# Altium PCB Dolphin.PcbDoc (part 1 of 3)
Units mil, origin at the board's own origin, x right, y up, seen from the top; angles counter-clockwise.
Board outline 4250 x 2750 mil, 4 copper layers (Top Layer, GND, POWER, Bottom Layer); 213 components, 151 nets, 660 pads, 338 vias.
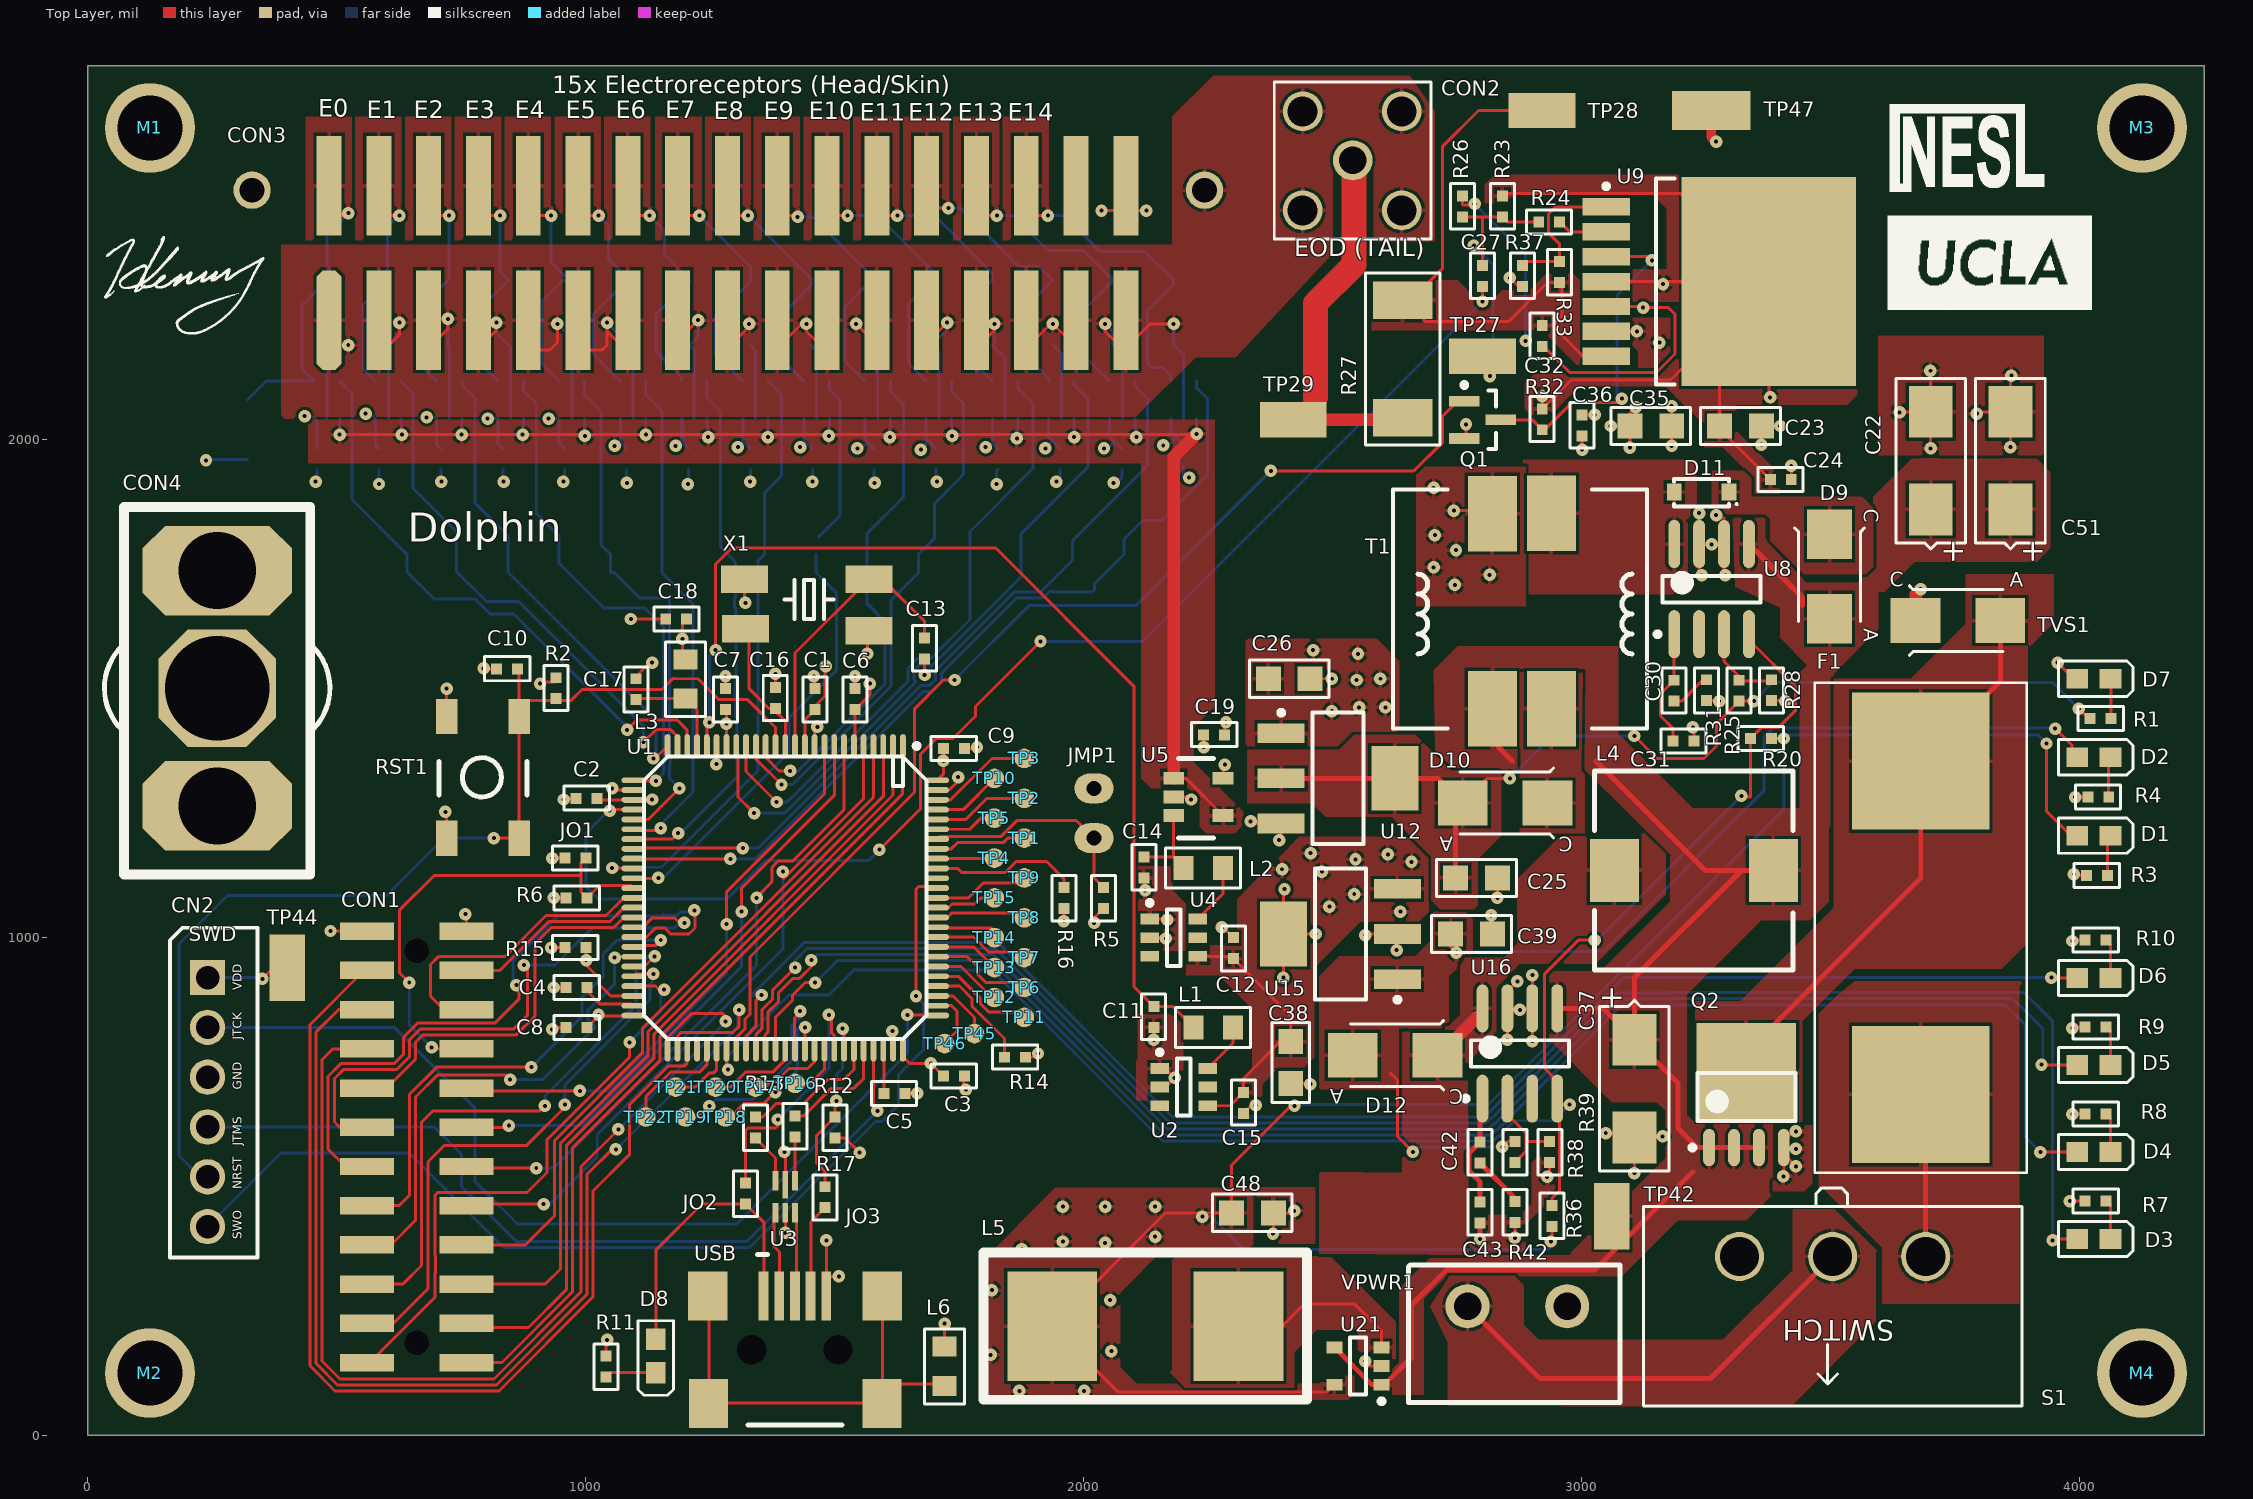
[diagram p0: Top Layer view]
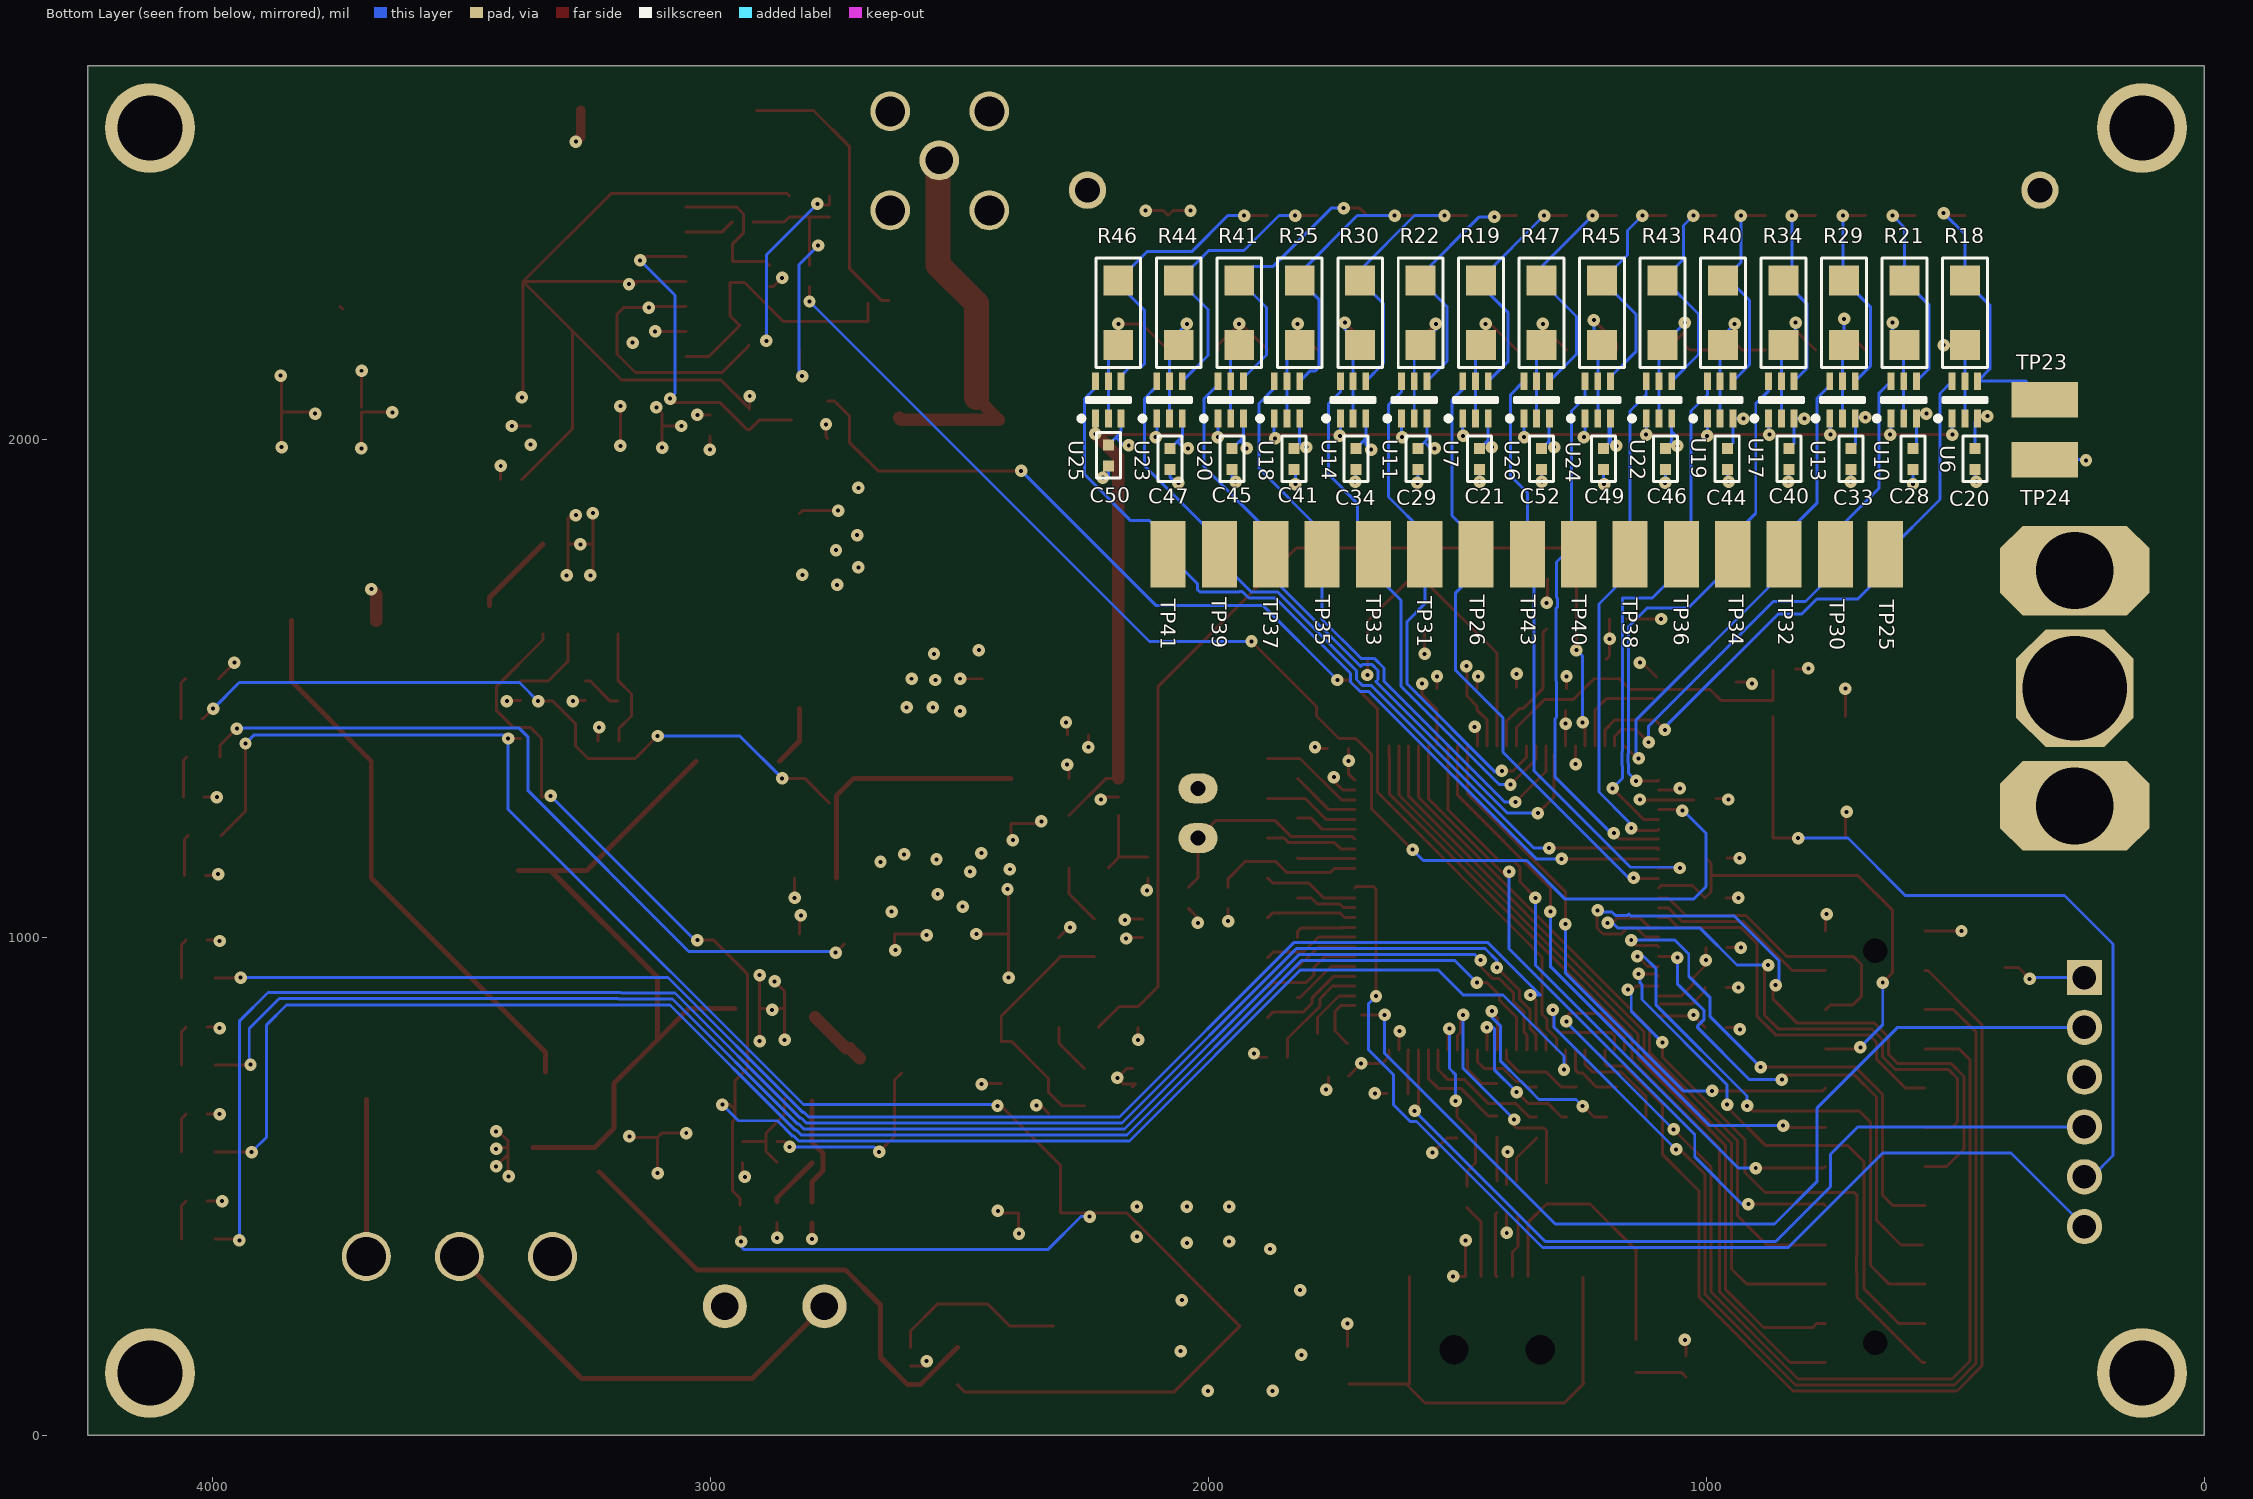
[diagram p1: Bottom Layer view, seen from below]
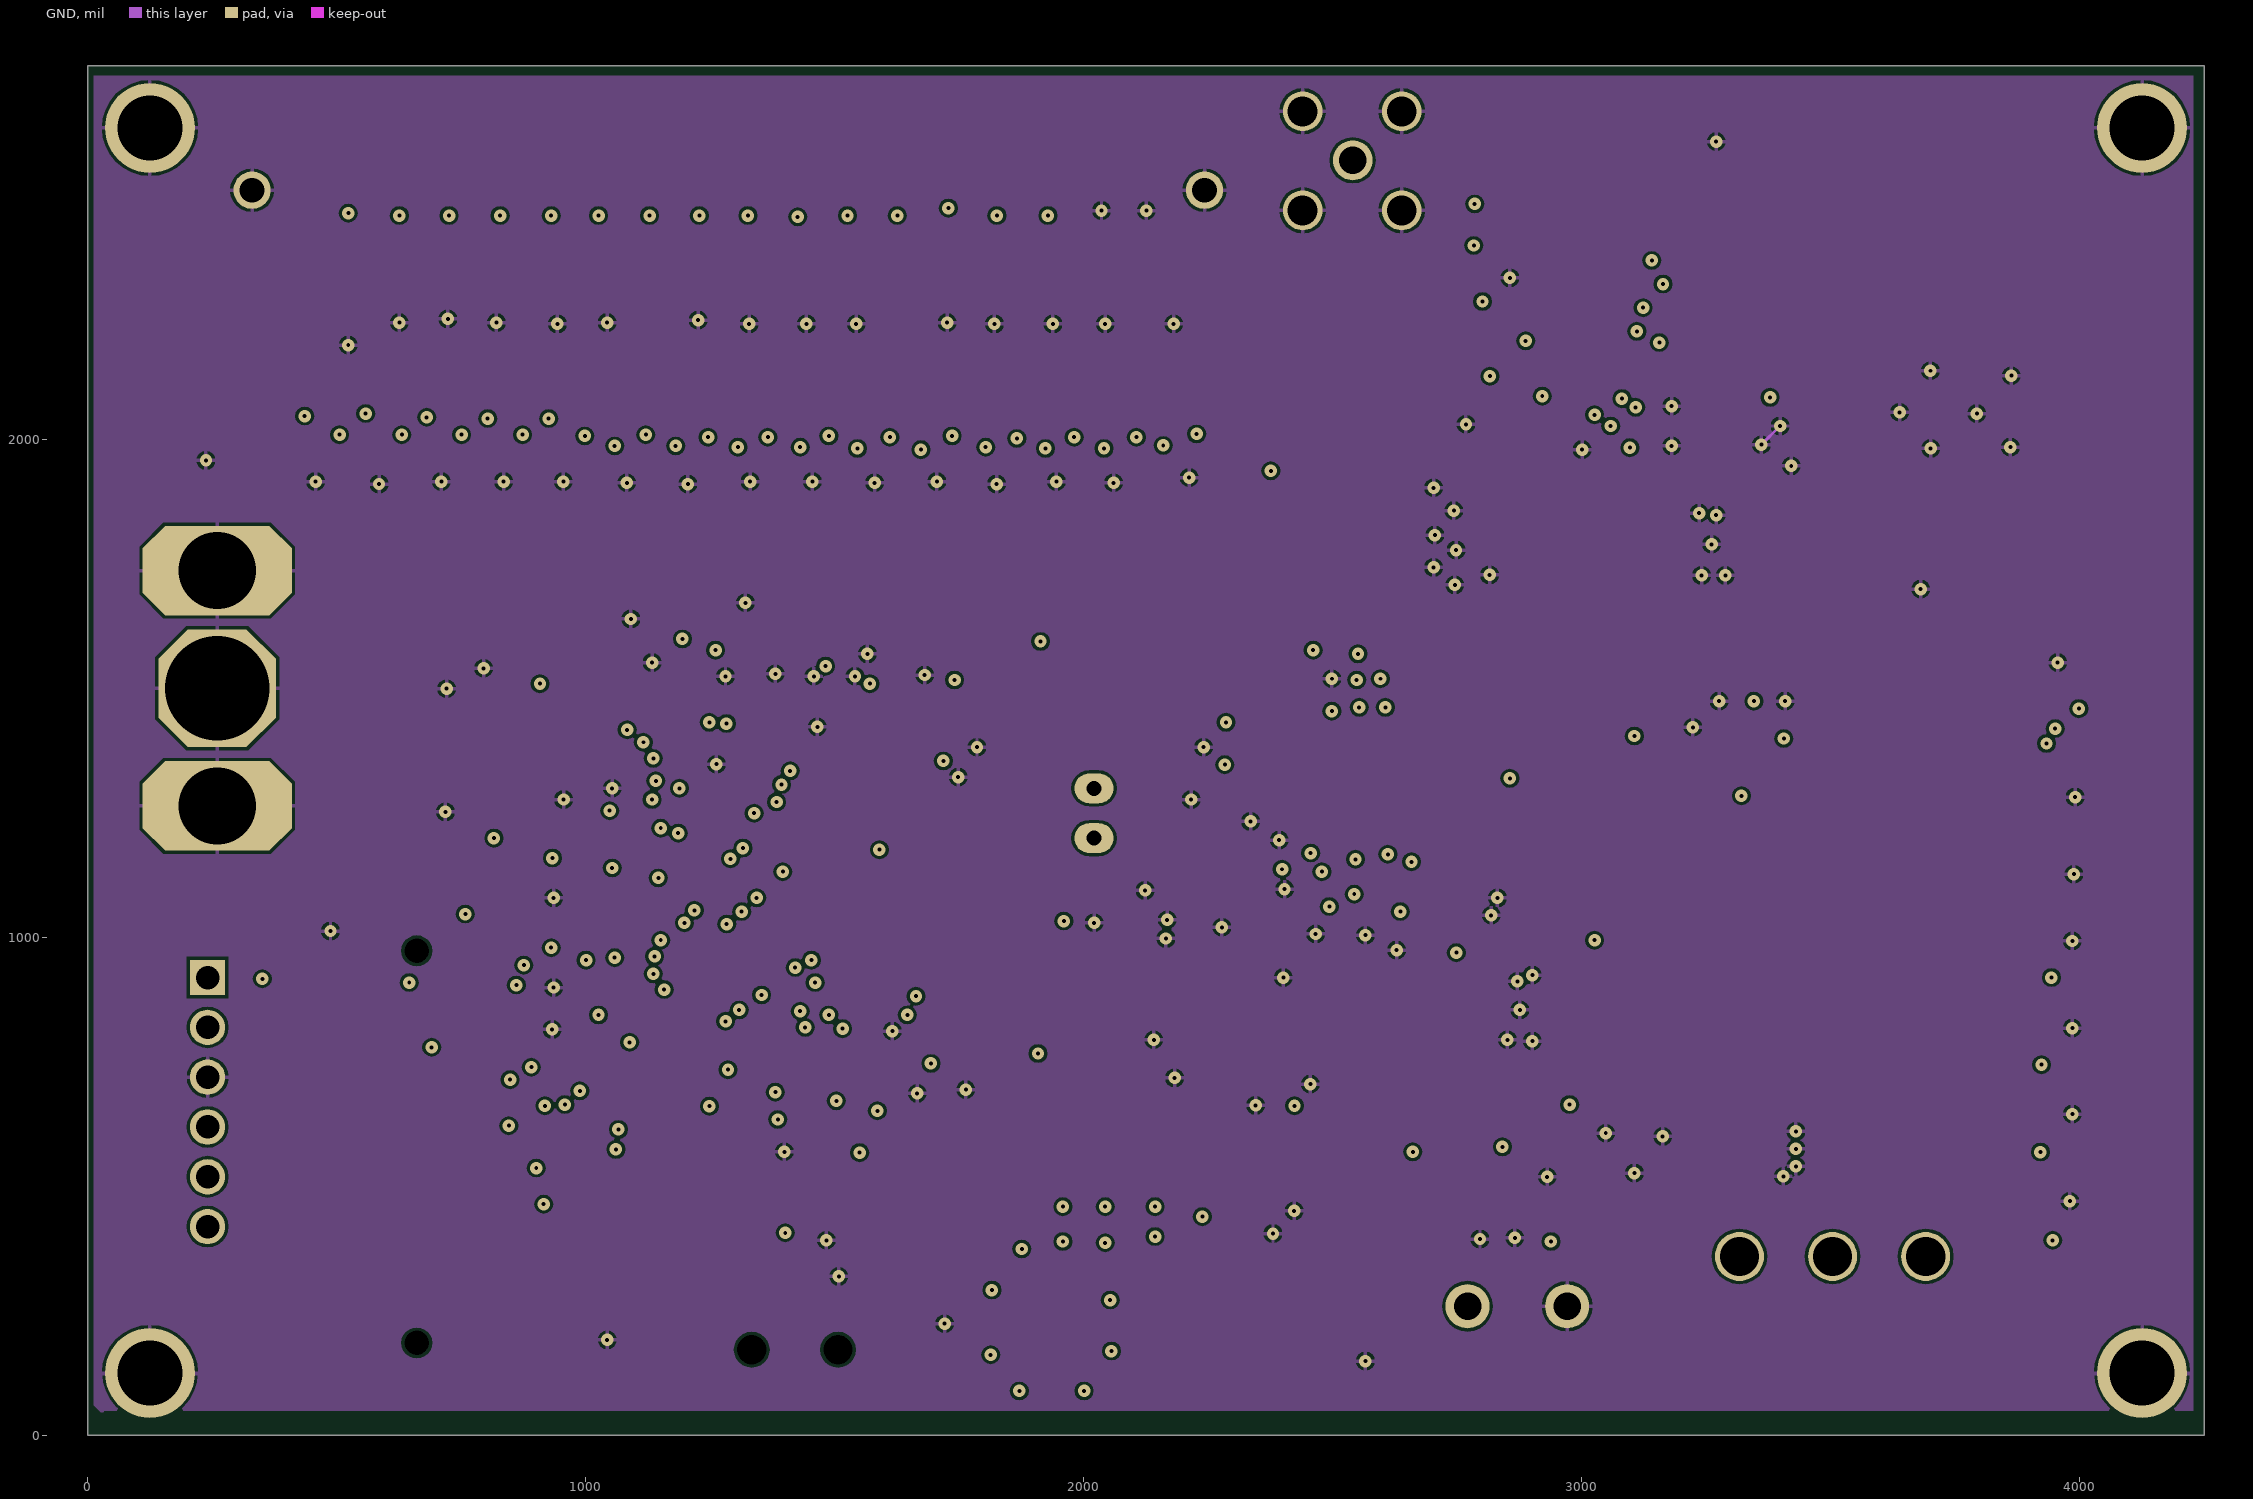
[diagram p2: GND]
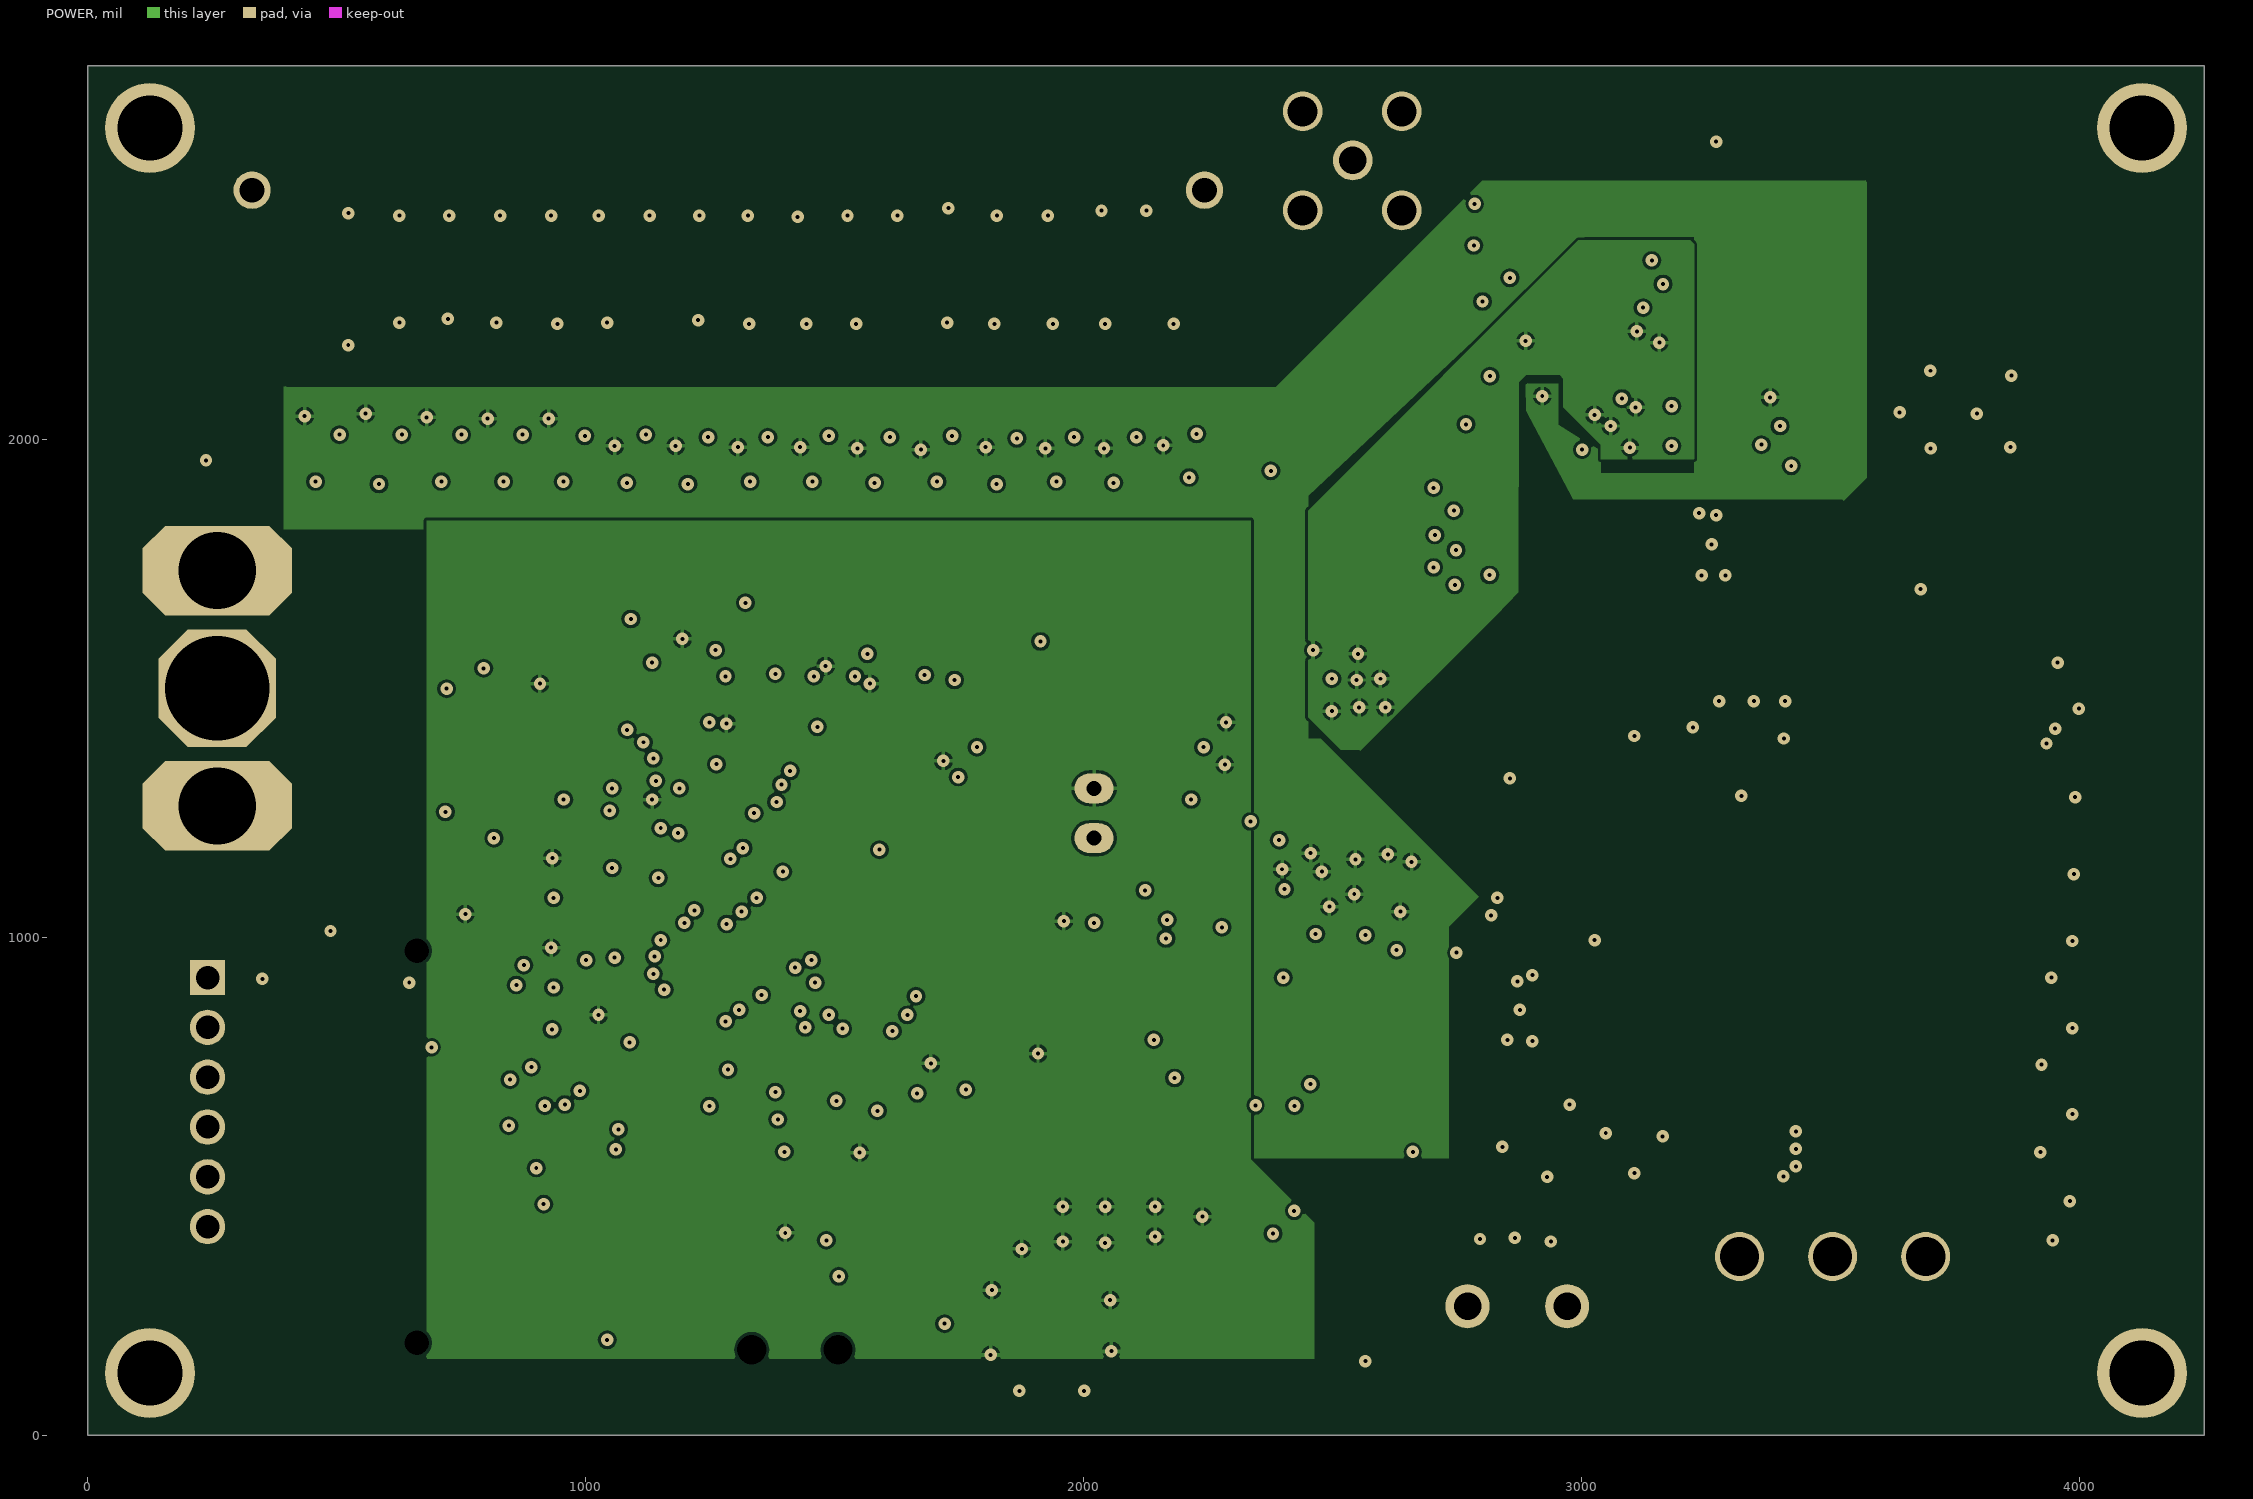
[diagram p3: POWER]

## Layer stack, top to bottom
Top Layer: signal copper 1.4
Dielectric: core 12.6, FR-4, Dk 4.8
GND: signal copper 1.4
Dielectric: prepreg 12.6, FR-4, Dk 4.8
POWER: signal copper 1.4
Dielectric: core 12.6, FR-4, Dk 4.8
Bottom Layer: signal copper 1.4

## Board outline
0,0 4250,0 4250,2750 0,2750

## Design rules (kind name [scope] priority, off if disabled: settings)
Clearance "Clearance~Sunstone Circuits" [All] p1: gap=6 // Sunstone Circuits Minimum Clearance Rule (MLB~4&6 Layer Designs)
HoleSize "HoleSize~Sunstone Circuits" [All] p1: absolutevalues=TRUE maxlimit=251 minlimit=8 maxpercent=80.000 minpercent=20.000 // Sunstone Circuits Hole Size Rule (MLB~4&6 Layer Designs)
HoleSize Testpoint [All] p2: absolutevalues=TRUE maxlimit=100 minlimit=1 maxpercent=80.000 minpercent=20.000
HoleSize TestPointUsage [All] p3: absolutevalues=TRUE maxlimit=100 minlimit=1 maxpercent=80.000 minpercent=20.000
MinimumAnnularRing "MinimumAnnularRing~Sunstone Circuits" [All] p1: minimumring=7 // Sunstone Circuits Minimum Annular Ring (MLB~4&6 Layer Designs)
PlaneClearance "PlaneClearance~Sunstone Circuits" [All] p1: clearance=12 // Sunstone Circuits Power Plane Clearance Rule (MLB~4&6 Layer Designs)
PlaneConnect "PlaneConnect~Sunstone Circuits" [All] p1: planeconnectstyle=Relief reliefexpansion=10 reliefentries=4 reliefconductorwidth=8 reliefairgap=10 // Sunstone Circuits Power Plane Connect Rule (MLB~4&6 Layer Designs)
PolygonConnect "PolygonConnect~Sunstone Circuits" [All] p1: connectstyle=Relief reliefconductorwidth=8 reliefentries=4 polygonreliefangle="90 Angle" // Sunstone Circuits Polygon Connect Style (MLB~4&6 Layer Designs)
RoutingVias "RoutingVias~Sunstone Circuits" [All] p1: holewidth=16 width=30 viastyle="Through Hole" minholewidth=8 minwidth=24 maxholewidth=20 maxwidth=40 // Sunstone Circuits Routing Vias Rule (MLB~4&6 Layer Designs)
ShortCircuit "ShortCircuit~Sunstone Circuits" [All] p1: allowed=FALSE // Sunstone Circuits Short Circuit Rule~Do Not Allow (MLB~4&6 Layer Designs)
SilkscreenOverComponentPads [All] p1: minsilkscreentomaskgap=10
SolderMaskExpansion "SolderMaskExpansion~Sunstone Circuits" [All] p1: expansion=3 // Sunstone Circuits Solder Mask Expansion Rule (MLB~4&6 Layer Designs)
ViasUnderSMD "ViasUnderSMD~Sunstone Circuits" [All] p1: allowed=FALSE // Sunstone Circuits Vias Under SMD~Do Not Allow (MLB~4&6 Layer Designs)
Width "Width~Sunstone Circuits" [All] p1: maxlimit=100 minlimit=6 preferedwidth=10 // Sunstone Circuits Minimum Width Rule (MLB~4&6 Layer Designs)
23 further rules are at their usual default settings.

## Components (designator, comment, footprint, x,y, rotation, side; value= is the part's Value field where it differs from the comment)
C1 "CAP" SM/C_0402 1460.65,1499.04 r270 top
C2 "CAP" SM/C_0402 980.65,1279.04 r0 top
C3 "CAP" SM/C_0402 1760.65,721.54 r180 top
C4 "CAP" SM/C_0402 960.65,899.04 r0 top
C5 "CAP" SM/C_0402 1640.65,686.54 r180 top
C6 "CAP" SM/C_0402 1540.65,1499.04 r270 top
C7 "CAP" SM/C_0402 1280.65,1499.04 r270 top
C8 "CAP" SM/C_0402 960.65,819.04 r0 top
C9 "CAP" SM/C_0402 1760.65,1379.04 r180 top
C10 "CAP" SM/C_0402 820.65,1539.04 r0 top
C11 "CAP" SM/C_0402 2140.65,819.04 r90 top
C12 "CAP" SM/C_0402 2300.65,999.04 r270 top
C13 "CAP" SM/C_0402 1680.65,1559.04 r90 top
C14 "CAP" SM/C_0402 2120.65,1119.04 r90 top
C15 "CAP" SM/C_0402 2320.65,646.54 r90 top
C16 "CAP" SM/C_0402 1380.65,1459.04 r90 top
C17 "CAP" SM/C_0402 1100.65,1519.04 r270 top
C18 "CAP" SM/C_0402 1160.65,1639.04 r0 top
C19 "CAP" SM/C_0402 2240.65,1406.54 r0 top
C20 "CAP" SM/C_0402 460.65,1939.04 r90 bottom
C21 "CAP" SM/C_0402 1454.93,1939.04 r90 bottom
C22 "CAP_POL" SM/CT_6032_12 3700.65,1859.04 r90 top
C23 "CAP" SM/C_0805 3360.65,2026.54 r180 top
C24 "CAP" SM/C_0402 3420.65,1919.04 r180 top
C25 "CAP" SM/C_0805 2830.65,1119.04 r180 top
C26 "CAP" SM/C_0805 2370.65,1519.04 r0 top
C27 "CAP" SM/C_0402 2800.65,2306.54 r90 top
C28 "CAP" SM/C_0402 584.93,1939.04 r90 bottom
C29 "CAP" SM/C_0402 1579.22,1939.04 r90 bottom
C30 "CAP" SM/C_0402 3185.65,1474.04 r90 top
C31 "CAP" SM/C_0402 3225.65,1394.04 r180 top
C32 "CAP" SM/C_0402 2920.65,2186.54 r90 top
C33 "CAP" SM/C_0402 709.22,1939.04 r90 bottom
C34 "CAP" SM/C_0402 1703.5,1939.04 r90 bottom
C35 "CAP" SM/C_0805 3180.65,2026.54 r180 top
C36 "CAP" SM/C_0402 3000.65,2006.54 r90 top
C37 "CAP_POL" SM/CT_6032_12 3105.65,794.04 r270 top
C38 "CAP" SM/C_0805 2415.65,706.54 r90 top
C39 "CAP" SM/C_0805 2820.65,1006.54 r180 top
C40 "CAP" SM/C_0402 833.5,1939.04 r90 bottom
C41 "CAP" SM/C_0402 1827.79,1939.04 r90 bottom
C42 "CAP" SM/C_0402 2795.65,546.54 r90 top
C43 "CAP" SM/C_0402 2795.65,426.54 r90 top
C44 "CAP" SM/C_0402 957.79,1939.04 r90 bottom
C45 "CAP" SM/C_0402 1952.07,1939.04 r90 bottom
C46 "CAP" SM/C_0402 1082.07,1939.04 r90 bottom
C47 "CAP" SM/C_0402 2076.36,1939.04 r90 bottom
C48 "CAP" SM/C_0805 2380.65,446.54 r180 top
C49 "CAP" SM/C_0402 1206.36,1939.04 r90 bottom
C50 "CAP" SM/C_0402 2200.64,1946.54 r90 bottom
C51 "CAP_POL" SM/CT_6032_12 3860.65,1859.04 r90 top
C52 "CAP" SM/C_0402 1330.64,1939.04 r90 bottom
CN2 "SWD" M06X1-Header-thru 240.65,919.04 r0 top
CON1 "24pinHeader" CONN-RECEPT-24PIN 660.65,579.04 r90 top
CON2 "SMA" SMA-SMA-VERT 2540,2560 r0 top
CON3 "34 Pin Header" "34Pin-Rectangular Header-SurfaceMount-100milSpacing" 484.65,2239.03 r0 top
CON4 "SCREW TERM (10-32)" LOW-PROFILE-SCREWTERMINAL 260,1500 r270 top
D1 "ORGE" LED-0603 4028.15,1204.04 r0 top
D2 "ORGE" LED-0603 4028.15,1361.54 r0 top
D3 "ORGE" LED-0603 4028.15,394.04 r0 top
D4 "BLUE" LED-0603 4028.15,568.72 r0 top
D5 "RED" LED-0603 4028.15,743.4 r0 top
D6 "GREEN" LED-0603 4028.15,918.08 r0 top
D7 "GREEN" LED-0603 4028.15,1519.04 r0 top
D8 "468 NM" LED-0603 1140.65,159.04 r270 top
D9 "TVS" D0-214AC 3500.65,1719.04 r270 top
D10 "MBRS130LT3G" D0-214AC 2840.65,1266.54 r180 top
D11 "1N4148WX" "SOD323 - MCC - 1N4148WX" 3145.65,1914.04 r180 top
D12 "MBRS130LT3G" D0-214AC 2620,760 r180 top
F1 "0031.8221" "SCHURTER/SMD/2 PADS/0031.8221" 3680.65,1019.04 r90 top
JMP1 "JMPR-2PIN-THRU" M02 2020.65,1199.04 r90 top
JO1 "Res" SM/R_0402 1000.65,1159.04 r180 top
JO2 "Res" SM/R_0402 1320.65,506.54 r270 top
JO3 "Res" SM/R_0402 1480.65,499.04 r270 top
L1 "Inductor" SM/L_0805 2220.65,819.04 r0 top
L2 "Inductor" SM/L_0805 2200.65,1139.04 r0 top
L3 "Inductor" SM/L_0805 1200.65,1479.04 r90 top
L4 "22uH" G_JMETRIC/TDK/SLE10145 3065.65,1134.04 r0 top
L5 "IHSM3825ER100L" "INDUCTOR POWER 10UH 1.74A SMD" 2310.65,219.04 r180 top
L6 "Inductor" SM/L_0805 1720.65,99.04 r90 top
M1 "M3" MOUNTING_HOLE-125mil#1 220.65,2359.04 r0 top
M2 "M3" MOUNTING_HOLE-125mil#2 300.65,199.04 r0 top
M3 "M3" MOUNTING_HOLE-125mil#3 4000.65,2399.04 r0 top
M4 "M3" MOUNTING_HOLE-125mil#4 4000.65,199.04 r0 top
Q1 "BSS84-PFET" SOT23-BSS84-P-MOSFET 2800.65,2039.04 r0 top
Q2 "SI4423DY-T1-E3" SOIC-8-Lead-Vishay-PFET 3330.65,679.04 r90 top
R1 "Res" SM/R_0402 4020.65,1439.04 r0 top
R2 "Res" SM/R_0402 940.65,1479.04 r90 top
R3 "Res" SM/R_0402 4055.65,1124.04 r180 top
R4 "Res" SM/R_0402 4058.15,1281.54 r180 top
R5 "Res" SM/R_0402 2040,1100 r270 top
R6 "Res" SM/R_0402 960.65,1079.04 r0 top
R7 "Res" SM/R_0402 4010.58,469.99 r0 top
R8 "Res" SM/R_0402 4010.58,644.67 r0 top
R9 "Res" SM/R_0402 4010.58,819.36 r0 top
R10 "Res" SM/R_0402 4010.58,994.04 r0 top
R11 "Res" SM/R_0402 1040.65,159.04 r270 top
R12 "Res" SM/R_0402 1500.65,639.04 r270 top
R13 "Res" SM/R_0402 1340.65,639.04 r270 top
R14 "Res" SM/R_0402 1840.65,759.04 r0 top
R15 "Res" SM/R_0402 1000.65,979.04 r180 top
R16 "Res" SM/R_0402 1960,1100 r270 top
R17 "Res" SM/R_0402 1420.65,599.04 r90 top
R18 "Res" SM/R_1206 480.65,2319.04 r270 bottom
R19 "Res" SM/R_1206 1452.07,2319.04 r270 bottom
R20 "Res" SM/R_0402 3380.65,1399.04 r180 top
R21 "Res" SM/R_1206 602.07,2319.04 r270 bottom
R22 "Res" SM/R_1206 1573.5,2319.04 r270 bottom
R23 "Res" SM/R_0402 2840.65,2446.54 r90 top
R24 "Res" SM/R_0402 2955.65,2436.54 r180 top
R25 "Res" SM/R_0402 3315.78,1474.04 r90 top
R26 "Res" SM/R_0402 2760.65,2446.54 r90 top
R27 "Res" SM/R_2512 2640.65,2279.04 r270 top
R28 "Res" SM/R_0402 3380.64,1517.04 r270 top
R29 "Res" SM/R_1206 723.5,2319.04 r270 bottom
R30 "Res" SM/R_1206 1694.93,2319.04 r270 bottom
R31 "Res" SM/R_0402 3250.51,1517.04 r270 top
R32 "Res" SM/R_0402 2920.65,2019.04 r90 top
R33 "Res" SM/R_0402 2955.65,2356.54 r270 top
R34 "Res" SM/R_1206 844.93,2319.04 r270 bottom
R35 "Res" SM/R_1206 1816.36,2319.04 r270 bottom
R36 "Res" SM/R_0402 2940.65,419.04 r90 top
R37 "Res" SM/R_0402 2880.65,2306.54 r90 top
R38 "Res" SM/R_0402 2865.55,589.54 r270 top
R39 "Res" SM/R_0402 2935.65,589.54 r270 top
R40 "Res" SM/R_1206 966.36,2319.04 r270 bottom
R41 "Res" SM/R_1206 1937.79,2319.04 r270 bottom
R42 "Res" SM/R_0402 2865.55,469.54 r270 top
R43 "Res" SM/R_1206 1087.79,2319.04 r270 bottom
R44 "Res" SM/R_1206 2059.22,2319.04 r270 bottom
R45 "Res" SM/R_1206 1209.22,2319.04 r270 bottom
R46 "Res" SM/R_1206 2180.64,2319.04 r270 bottom
R47 "Res" SM/R_1206 1330.64,2319.04 r270 bottom
RST1 "MOM-SW" MOM-SW 720.65,1199.04 r90 top
S1 "SPDT" SW_Lseries 3690.65,359.04 r180 top
T1 "DRQ127-100" DRQ127-100 2820.65,1459.04 r90 top
TP1 "TEST_PT" SMD_TP 1880.65,1199.04 r0 top
TP2 "TEST_PT" SMD_TP 1880.65,1279.04 r90 top
TP3 "TEST_PT" SMD_TP 1880.65,1359.04 r90 top
TP4 "TEST_PT" SMD_TP 1820.65,1159.04 r90 top
TP5 "TEST_PT" SMD_TP 1820.65,1239.04 r90 top
TP6 "TEST_PT" SMD_TP 1880.65,899.04 r90 top
TP7 "TEST_PT" SMD_TP 1880.65,959.04 r90 top
TP8 "TEST_PT" SMD_TP 1880.65,1039.04 r90 top
TP9 "TEST_PT" SMD_TP 1880.65,1119.04 r90 top
TP10 "TEST_PT" SMD_TP 1820.65,1319.04 r90 top
TP11 "TEST_PT" SMD_TP 1880.65,839.04 r90 top
TP12 "TEST_PT" SMD_TP 1820.65,879.04 r90 top
TP13 "TEST_PT" SMD_TP 1820.65,939.04 r90 top
TP14 "TEST_PT" SMD_TP 1820.65,999.04 r90 top
TP15 "TEST_PT" SMD_TP 1820.65,1079.04 r90 top
TP16 "TEST_PT" SMD_TP 1420.65,706.54 r90 top
TP17 "TEST_PT" SMD_TP 1340.65,699.04 r90 top
TP18 "TEST_PT" SMD_TP 1280.65,639.04 r90 top
TP19 "TEST_PT" SMD_TP 1200.65,639.04 r90 top
TP20 "TEST_PT" SMD_TP 1260.65,699.04 r90 top
TP21 "TEST_PT" SMD_TP 1180.65,699.04 r90 top
TP22 "TEST_PT" SMD_TP 1120.65,639.04 r90 top
TP23 "TEST_PT" TEST_PT_SMD#1 320.65,2079.04 r0 bottom
TP24 "TEST_PT" TEST_PT_SMD#1 320.65,1959.04 r180 bottom
TP25 "TEST_PT" TEST_PT_SMD#1 640.65,1769.04 r270 bottom
TP26 "TEST_PT" TEST_PT_SMD#1 1462.18,1769.04 r270 bottom
TP27 "TEST_PT" TEST_PT_SMD#1 2800.65,2166.54 r0 top
TP28 "TEST_PT" TEST_PT_SMD#1 2920,2660 r180 top
TP29 "TEST_PT" TEST_PT_SMD#1 2420.65,2039.04 r0 top
TP30 "TEST_PT" TEST_PT_SMD#1 740.65,1769.04 r270 bottom
TP31 "TEST_PT" TEST_PT_SMD#1 1565.26,1769.04 r270 bottom
TP32 "TEST_PT" TEST_PT_SMD#1 843.72,1769.04 r270 bottom
TP33 "TEST_PT" TEST_PT_SMD#1 1668.34,1769.04 r270 bottom
TP34 "TEST_PT" TEST_PT_SMD#1 946.8,1769.04 r90 bottom
TP35 "TEST_PT" TEST_PT_SMD#1 1771.41,1769.04 r90 bottom
TP36 "TEST_PT" TEST_PT_SMD#1 1049.88,1769.04 r90 bottom
TP37 "TEST_PT" TEST_PT_SMD#1 1874.49,1769.04 r90 bottom
TP38 "TEST_PT" TEST_PT_SMD#1 1152.95,1769.04 r90 bottom
TP39 "TEST_PT" TEST_PT_SMD#1 1977.57,1769.04 r90 bottom
TP40 "TEST_PT" TEST_PT_SMD#1 1256.03,1769.04 r90 bottom
TP41 "TEST_PT" TEST_PT_SMD#1 2080.64,1769.04 r90 bottom
TP42 "TEST_PT" TEST_PT_SMD#1 3060,440 r270 top
TP43 "TEST_PT" TEST_PT_SMD#1 1359.11,1769.04 r90 bottom
TP44 "TEST_PT" TEST_PT_SMD#1 400.65,939.04 r90 top
TP45 "TEST_PT" SMD_TP 1780.65,806.54 r90 top
TP46 "TEST_PT" SMD_TP 1720.65,786.54 r90 top
TP47 "TEST_PT" TEST_PT_SMD#2 3260,2660 r180 top
TVS1 "SMAJ5.0CA" D0-214AC 3760.65,1639.04 r0 top
U1 "STM32F407" "LQFP100 14x14mm" 1400.65,1079.04 r270 top
U2 "LT1790-4.096" LT1790--VREF-TSOT23 2200.65,699.04 r0 top
U3 "USBUF01P6" USB-EMI-STM-USBUF01P6-SOT666IP 1400.65,479.04 r180 top
U4 "LT1790-2.048" LT1790--VREF-TSOT23 2180.65,999.04 r0 top
U5 "OPA336" "SOT23-5 -TI" 2180.65,1319.04 r90 top
U6 "INA214" SC70-6pin-TI 480.65,2079.04 r90 bottom
U7 "INA214" SC70-6pin-TI 1463.5,2079.04 r90 bottom
U8 "LT1377" SOIC-8Pin-Linear 3260.65,1699.04 r90 top
U9 "LT1210" DDPak-7Lead-LinearTech 3255.65,2316.54 r0 top
U10 "INA214" SC70-6pin-TI 603.5,2079.04 r90 bottom
U11 "INA214" SC70-6pin-TI 1586.36,2079.04 r90 bottom
U12 "LT1175" SOT223-3Lead-STPackage-LinearTechLT1129-3.3 2510.65,1319.04 r0 top
U13 "INA214" SC70-6pin-TI 726.36,2079.04 r90 bottom
U14 "INA214" SC70-6pin-TI 1709.22,2079.04 r90 bottom
U15 "LT1129-5" SOT223-3Lead-STPackage-LinearTechLT1129-3.3 2515.65,1006.54 r180 top
U16 "LT1377" SOIC-8Pin-Linear 2875.65,766.54 r90 top
U17 "INA214" SC70-6pin-TI 849.22,2079.04 r90 bottom
U18 "INA214" SC70-6pin-TI 1841.92,2079.04 r90 bottom
U19 "INA214" SC70-6pin-TI 972.07,2079.04 r90 bottom
U20 "INA214" SC70-6pin-TI 1954.93,2079.04 r90 bottom
U21 "MCP1603L" TSOT-5Lead-MCP1603/B/L 2550.65,139.04 r180 top
U22 "INA214" SC70-6pin-TI 1094.93,2079.04 r90 bottom
U23 "INA214" SC70-6pin-TI 2077.79,2079.04 r90 bottom
U24 "INA214" SC70-6pin-TI 1217.79,2079.04 r90 bottom
U25 "INA214" SC70-6pin-TI 2200.64,2079.04 r90 bottom
U26 "INA214" SC70-6pin-TI 1340.64,2079.04 r90 bottom
USB "USB MiniB" USB-MINIB 1420,280 r0 top
VPWR1 "TERM BLOCK 2POS" Conn-ScrewTerminal-2pin-Phoenix 2970.65,259.04 r180 top
X1 "XTAL-ABMM" ABMM-Crystal 1320.65,1619.04 r0 top

## Footprints (in the part's own frame and the unit in brackets; to place one, negate y for a bottom-side part, rotate by r counter-clockwise, add the part's x,y. Pads: shape width x height; smd on the part's side, far side on the other; paste and mask are expansions set on the pad)
"34Pin-Rectangular Header-SurfaceMount-100milSpacing" [mm]
  oct 1.27x5.08 smd: 1(0,0)
  rect 1.27x5.08 smd: 2(0,6.86) 3(2.54,0) 4(2.54,6.86) 5(5.08,0) 6(5.08,6.86) 7(7.62,0) 8(7.62,6.86) 9(10.16,0) 10(10.16,6.86) 11(12.7,0) 12(12.7,6.86) 13(15.24,0) 14(15.24,6.86) 15(17.78,0) 16(17.78,6.86) 17(20.32,0) 18(20.32,6.86) 19(22.86,0) 20(22.86,6.86) 21(25.4,0) 22(25.4,6.86) 23(27.94,0) 24(27.94,6.86) 25(30.48,0) 26(30.48,6.86) 27(33.02,0) 28(33.02,6.86) 29(35.56,0) 30(35.56,6.86) 31(38.1,0) 32(38.1,6.86) 33(40.64,0) 34(40.64,6.86)
ABMM-Crystal [mm] "Abracon Crystal - 6MHz to 125MHz (ABMM)"
  rect 2.4x1.4 smd: 1(0,0) 2(-0.051,2.54) 3(6.3,2.54) 4(6.3,-0.102)
  silkscreen extent 2,0.5 4.5,2.5
CONN-RECEPT-24PIN [mm] "2MM-SMD-DUAL-24POS-PART#:S6010-12-ND"
  rect 0x0 hole 1.25: 0(-10,0) 0(10,0)
  rect 0.89x2.75 smd: 1(-11,-2.54) 2(-11,2.54) 2(-11,2.54) 3(-9,-2.54) 4(-9,2.54) 5(-7,-2.54) 6(-7,2.54) 7(-5,-2.54) 8(-5,2.54) 9(-3,-2.54) 10(-3,2.54) 11(-1,-2.54) 12(-1,2.54) 13(1,-2.54) 14(1,2.54) 15(3,-2.54) 16(3,2.54) 17(5,-2.54) 18(5,2.54) 19(7,-2.54) 20(7,2.54) 21(9,-2.54) 22(9,2.54) 23(11,-2.54) 24(11,2.54)
Conn-ScrewTerminal-2pin-Phoenix [mm] "5.08mm"
  round 2.25 hole 1.4: 1(0,0) 2(5.08,0)
  silkscreen extent -2.7,-2.1 8.1,4.9
D0-214AC [mil]
  rect 100x90 smd: A(79.68,-3.19) C(-90.32,-3.19)
  silkscreen extent -103,-73 85,67
DDPak-7Lead-LinearTech [mil] "DDPak-LT1210"
  rect 95x35 smd: 1(-206.69,150) 2(-206.69,100) 3(-206.69,50) 4(-206.69,0) 5(-206.69,-50) 6(-206.69,-100) 7(-206.69,-150)
  rect 350x420 smd: 8(120.08,0)
  silkscreen extent -212,-207 -69,207, body extent -175,-208 179,208, height 157
DRQ127-100 [mm] "Dual Transformer"
  rect 3.85x2.5 smd: 1(0,0) 2(0,-3) 3(9.955,-3) 4(9.95,0)
  silkscreen extent -1.02,-7.87 11.18,5.08, body extent -1.02,-7.87 11.18,5.08, height 8
G_JMETRIC/TDK/SLE10145 [mil]
  rect 98.4x126 smd: 1(0,0) 2(318.88,0)
  silkscreen extent -40,-200 358,200
"INDUCTOR POWER 10UH 1.74A SMD" [mil] "INDUCTOR POWER 10UH 1.74A SMD"
  rect 180x220 smd: 1(0,0) 2(374.02,0)
  silkscreen extent -138,-148 512,148
LED-0603 [mm] "Chip Resistor; Body 1.6 x 0.9 mm (LxW typ)"
  rect 1.1x1 smd: 1(-0.85,0) 2(0.85,0)
  silkscreen extent -1.8,-0.9 2,0.9
LOW-PROFILE-SCREWTERMINAL [mil] "TERMINAL SCREW 10/32 .062\"PC MNT"
  oct 180x300 hole 155: 1(-236.22,0) 1(236.22,0)
  oct 236.22x236.22 hole 210: 1(0,0)
  silkscreen extent -364,-226 374,226
"LQFP100 14x14mm" [mm] "For STM32F407"
  oval 1.2x0.3 smd: 1(-7.75,6) 2(-7.75,5.5) 3(-7.75,5) 4(-7.75,4.5) 5(-7.75,4) 6(-7.75,3.5) 7(-7.75,3) 8(-7.75,2.5) 9(-7.75,2) 10(-7.75,1.5) 11(-7.75,1) 12(-7.75,0.5) 13(-7.75,0) 14(-7.75,-0.5) 15(-7.75,-1) 16(-7.75,-1.5) 17(-7.75,-2) 18(-7.75,-2.5) 19(-7.75,-3) 20(-7.75,-3.5) 21(-7.75,-4) 22(-7.75,-4.5) 23(-7.75,-5) 24(-7.75,-5.5) 25(-7.75,-6) 51(7.75,-6) 52(7.75,-5.5) 53(7.75,-5) 54(7.75,-4.5) 55(7.75,-4) 56(7.75,-3.5) 57(7.75,-3) 58(7.75,-2.5) 59(7.75,-2) 60(7.75,-1.5) 61(7.75,-1) 62(7.75,-0.5) 63(7.75,0) 64(7.75,0.5) 65(7.75,1) 66(7.75,1.5) 67(7.75,2) 68(7.75,2.5) 69(7.75,3) 70(7.75,3.5) 71(7.75,4) 72(7.75,4.5) 73(7.75,5) 74(7.75,5.5) 75(7.75,6)
  oval 0.3x1.2 smd: 26(-6,-7.75) 27(-5.5,-7.75) 28(-5,-7.75) 29(-4.5,-7.75) 30(-4,-7.75) 31(-3.5,-7.75) 32(-3,-7.75) 33(-2.5,-7.75) 34(-2,-7.75) 35(-1.5,-7.75) 36(-1,-7.75) 37(-0.5,-7.75) 38(0,-7.75) 39(0.5,-7.75) 40(1,-7.75) 41(1.5,-7.75) 42(2,-7.75) 43(2.5,-7.75) 44(3,-7.75) 45(3.5,-7.75) 46(4,-7.75) 47(4.5,-7.75) 48(5,-7.75) 49(5.5,-7.75) 50(6,-7.75) 76(6,7.75) 77(5.5,7.75) 78(5,7.75) 79(4.5,7.75) 80(4,7.75) 81(3.5,7.75) 82(3,7.75) 83(2.5,7.75) 84(2,7.75) 85(1.5,7.75) 86(1,7.75) 87(0.5,7.75) 88(0,7.75) 89(-0.5,7.75) 90(-1,7.75) 91(-1.5,7.75) 92(-2,7.75) 93(-2.5,7.75) 94(-3,7.75) 95(-3.5,7.75) 96(-4,7.75) 97(-4.5,7.75) 98(-5,7.75) 99(-5.5,7.75) 100(-6,7.75)
  silkscreen extent -7.87,-7.2 7.2,7.2, body extent -7,-7 7,7, height 1.6
LT1790--VREF-TSOT23 [mm] "LT1790--VREF-TSOT23"
  rect 0.95x0.55 smd: 1(-1.225,0.95) 2(-1.225,0) 3(-1.225,-0.95) 4(1.225,-0.95) 5(1.225,0) 6(1.225,0.95)
  silkscreen extent -1.35,-1.45 0.35,1.9, body extent -0.87,-1.45 0.88,1.45, height 1
M02 [mil]
  oval 60x78.74 hole 30: 1(0,0) 2(100,0)
M06X1-Header-thru [mm]
  rect 1.8x1.8 hole 1.2: 1(0,0)
  round 1.8 hole 1.2: 2(0,-2.54) 3(0,-5.08) 4(0,-7.62) 5(0,-10.16) 6(0,-12.7)
  silkscreen extent -1.91,-14.29 2.54,2.54
MOM-SW [mm] "SMD-PTS525"
  rect 1.8x1.1 smd: 1(0,0) 2(6.2,0) 3(0,-3.7) 4(6.2,-3.7)
  silkscreen extent 2.1,-4.1 4.1,0.4
MOUNTING_HOLE-125mil#1 [mil]
  round 180 hole 130: 0(-95.65,265.96)
MOUNTING_HOLE-125mil#2 [mil]
  round 180 hole 130: 0(-175.65,-74.04)
MOUNTING_HOLE-125mil#3 [mil]
  round 180 hole 130: 0(124.35,225.96)
MOUNTING_HOLE-125mil#4 [mil]
  round 180 hole 130: 0(124.35,-74.04)
SC70-6pin-TI [mm] "INA21X - CurrentSense"
  rect 0.9x0.35 smd: 1(-0.95,0.65) 2(-0.95,0) 3(-0.95,-0.65) 4(0.95,-0.65) 5(0.95,0) 6(0.95,0.65)
  silkscreen extent -1.07,-1.1 0.1,1.5, body extent -0.75,-1.07 0.75,1.08, height 1.1
"SCHURTER/SMD/2 PADS/0031.8221" [mm] "5x20 mm Fuse Holder, SMD"
  rect 7x7 smd: 1(-8.5,0) 2(8.5,0)
  silkscreen extent -12.5,-5.4 12.5,5.4
SM/C_0402 [mil]
  rect 22x22 smd: 1(0,0) 2(42,0)
  silkscreen extent -24,-24 67,24
SM/C_0805 [mil]
  rect 50x50 smd: 1(0,0) 2(84,0)
  silkscreen extent -38,-38 122,38
SM/CT_6032_12 [mil]
  rect 104x88 smd: 1(0,0) 2(196,0)
  silkscreen extent -80,-70 263,70
SM/L_0805 [mil]
  rect 40x48 smd: 1(0,0) 2(79,0)
  silkscreen extent -36,-40 114,40
SM/R_0402 [mil]
  rect 22x22 smd: 1(0,0) 2(42,0)
  silkscreen extent -24,-24 67,24
SM/R_1206 [mil]
  rect 60x60 smd: 1(0,0) 2(130,0)
  silkscreen extent -45,-45 175,45
SM/R_2512 [mil]
  rect 76x120 smd: 1(0,0) 2(236,0)
  silkscreen extent -55,-75 290,75
SMA-SMA-VERT [mil] "CONSMA008"
  round 80 hole 60: 0(-100.39,-100.39) 0(-100.39,98.43) 0(98.43,-100.39) 0(98.43,98.43)
  round 80 hole 55: 1(0,0)
  silkscreen extent -157,-157 157,157
SMD_TP [mm]
  round 1 smd: 1(0,0)
"SOD323 - MCC - 1N4148WX" [mil] "1N4148WX - Diode"
  rect 30x35 smd: A(-40,20) K(-150,20)
  silkscreen extent -167,-6 -39,49, body extent -148,-5 -41,48, height 45
SOIC-8-Lead-Vishay-PFET [mm] "NFET"
  rect 5x5.07 smd: D(1.27,0)
  oval 1.9x0.6 smd: G(-2.575,-1.905) S(-2.575,-0.635) S(-2.575,0.635) S(-2.575,1.905)
  silkscreen extent -2.7,-2.5 1.22,2.88, body extent -2,-2.5 2,2.5, height 1.75
SOIC-8Pin-Linear [mm] "LT1377 - Switching Regulator"
  oval 2.45x0.6 smd: 1(-2.3,1.905) 2(-2.3,0.635) 3(-2.3,-0.635) 4(-2.3,-1.905) 5(2.3,-1.905) 6(2.3,-0.635) 7(2.3,0.635) 8(2.3,1.905)
  silkscreen extent -2.42,-2.5 0.67,2.88, body extent -1.99,-2.5 1.99,2.5, height 1.75
"SOT23-5 -TI" [mm] "OPA335"
  rect 0.65x1.06 smd: 1(0,0) 2(-0.95,0) 3(-1.9,0) 4(-1.9,-2.518) 5(0,-2.518)
  silkscreen extent -3.05,-2.03 1.02,-0.25
SOT23-BSS84-P-MOSFET [mm] "SOT23, 3-Leads, Body 3.0x2.6mm (max), Pitch 0.95mm, IPC Medium Density - SOT23-BSS84-P-MOSFET"
  rect 1.55x0.55 smd: 1(0.925,0) 2(-0.925,0.95) 3(-0.925,-0.95)
  silkscreen extent -1.05,-1.5 0.7,1.9, body extent -0.7,-1.5 0.7,1.5, height 1.1
SOT223-3Lead-STPackage-LinearTechLT1129-3.3 [mm] "LT1129-3.3"
  rect 2.4x1 smd: 1(-2.9,2.3) 2(-2.9,0) 3(-2.9,-2.3)
  rect 2.4x3.3 smd: 4(2.9,0)
  silkscreen extent -3.02,-3.35 1.3,3.47, body extent -1.85,-3.35 1.85,3.35, height 1.8
SW_Lseries [mm] "L series right angle TH switch"
  round 2.5 hole 2: 1(0,0) 2(4.75,0) 3(9.5,0)
  silkscreen extent -4.9,-3.5 14.4,7.62
TEST_PT_SMD#1 [mm] "MINI_SMC_TEST_PT"
  rect 3.4x1.8 smd: 1(0,0)
TEST_PT_SMD#2 [mm] "MINI_SMC_TEST_PT"
  rect 4x2 smd: 1(0,0)
TSOT-5Lead-MCP1603/B/L [mm] "TSOT-5Lead-MCP1603/B/L - Switching Fixed Regulator"
  rect 0.8x0.6 smd: 1(-1.2,0.95) 2(-1.2,0) 3(-1.2,-0.95) 4(1.2,-0.95) 5(1.2,0.95)
  silkscreen extent -1.33,-1.45 0.4,1.92, body extent -0.8,-1.45 0.8,1.45, height 1.1
USB-EMI-STM-USBUF01P6-SOT666IP [mm] "USBUF01P6-SOT-666IP"
  rect 0.3x1 smd: 1(-0.5,-0.81) 3(0.5,-0.81) 4(0.5,0.81) 5(0,0.81) 6(-0.5,0.81)
  rect 0.3x1.4 smd: 2(0,-0.62)
USB-MINIB [mm] "SAMTEX-MUSB-05-X-B-SM-A-XX"
  rect 2x2.5 smd: 0(-4.45,0) 0(-4.4,-5.5) 0(4.44,-5.5) 0(4.45,0)
  rect 0.5x2.5 smd: 1(-1.6,0) 2(-0.8,0) 3(0,0) 4(0.8,0) 5(1.6,0)
  rect 0x0 hole 1.5: H(-2.2,-2.75) H(2.2,-2.75)
  silkscreen extent -2.4,-6.6 2.4,2.1

## Part data
C22 C37 C51: "CAP"
CN2: library part SWD-STM32F4-Program-Header
CON2: library part SMA-THRU-VERT
CON3: library part 34pinHeader
CON4: library part ScrewTerminal-PCB-ThruHole
D1 D2 D3 D5: library part 2002, "LED SUPER RED CLEAR 0603 SMD"
D4 D8: library part 2001, "LED 468NM BLUE CLEAR 0603 SMD"
D6 D7: library part 2067, "LED GREEN CLEAR 0603 SMD"
D10 D12: library part "Schottky Diode_AC"
D11: library part Diode-1N4148WX
F1: library part 2105, "FUSEHOLDER BLACK FOR SMD 5X20MM"
JO1 JO2 JO3 R1 R2 R3 R4 R5 R6 R7 R8 R9 R10 R11 R12 R13 R14 R15 R16 R17 R18 R19 R20 R21 R22 R23 R24 R25 R26 R27 R28 R29 R30 R31 R32 R33 R34 R35 R36 R37 R38 R39 R40 R41 R42 R43 R44 R45 R46 R47: "Resistor"
L4: library part 1660, "INDUCTOR SHIELD PWR 22UH 10145"
L5: library part INDUCTOR_POWER_10UH_1.74A_SMD
M1 M2 M3 M4: library part MountingHole
Q1: library part BSS84-MOSFET-P, "P-Channel MOSFET"
Q2: library part 2390, "mosfet,p ch,20v,10a,8soic; transistor polarity:p channel;"
RST1: library part MOM-TACT-SW
S1: library part SPDT-TH, "SPDT slide right angle TH high current switch"
T1: library part DRQ127-100-XFORM-1:1
TVS1: library part 2519, "TVS 400W 12V BIDIRECT SMA"
U1: "176 pin ARM CORTEX-M4"
U2 U4: library part LT1790-Volt-Ref
U5: library part OPA335
U6 U7 U10 U11 U13 U14 U17 U18 U19 U20 U22 U23 U24 U25 U26: library part INA21X-CurrentSenseAmp
U9: library part LT1210-OpAmp
USB: "Mini USB"
VPWR1: library part 2Pin-PhoenixTerminalBlock

## Free pads (board coordinates)
  round 75 hole 50: 0(330,2500) 1(2242.5,2500)

## Via types
v1: diameter 25, hole 8, Top Layer to Bottom Layer, tented both sides, 336 vias
v2: diameter 25, hole 8, Top Layer to Bottom Layer, 2 vias

## Nets (pads, with @x,y where several pads share a name; then routed paths per layer and width w, separated by ;. In a path a pad name is that pad's centre, name@x,y a point inside that pad or via, vN(x,y) a via of type N, cw(c..) or ccw(c..) an arc to the next point about the centre after c; other vN are vias at no path point)
3V3: C1.2 C2.2 C3.2 C6.2 C7.2 C8.2 C9.2 C18.2 C19.2 C48.2 CON1.23 D1.1 JMP1.2 JO1.2 L3.2 L5.2 R2.2 R12.2 R14.2 R15.2 R16.2 R20.1 R36.1 U1.6 U1.11 U1.19 U1.28 U1.50 U1.75 U1.100 U3.5 U5.5 U21.5 | length 5509.3
  Top Layer w6: v1(758.15,1046.54) 760.65,1044.04 CON1.23@760.65,1012.11 ; v1(908.15,1509.04) 911.61,1512.5 R2.2@940.65,1512.5 ; v1(930.65,979.04) R15.2@958.65,979.04 ; v1(933.15,1159.04) JO1.2@958.65,1159.04 ; C8.2@1002.65,819.04 1016.65,833.04 ; v1(1025.65,844.04) 1025.65,842.04 1016.65,833.04 ; C2.2@1025.79,1275.89 U1.28@1095.53,1275.89 1132.5,1275.89 v1(1133.15,1276.54) ; U1.50@1095.53,842.82 1094.25,841.54 1025.15,841.54 1016.65,833.04 ; C18.2@1194.11,1639.04 v1(1194.11,1599.04) 1194.11,1564.57 L3.2@1200.65,1558.04 ; U1.19@1282.53,1384.16 v1(1282.53,1429.04) C7.2@1282.53,1455.15 ; v1(1400.65,406.54) U3.5@1400.65,447.15 ; U1.11@1440.02,1384.16 1440.02,1436.41 C1.2@1460.65,1457.04 1460.65,1464.31 1480.65,1484.31 1480.65,1543.38 v1(1481.65,1544.38) ; R12.2@1500.65,597.04 1520.46,597.04 v1(1550,567.5) ; U1.6@1540.65,1386.36 C6.2@1540.65,1457.04 1570.65,1487.04 v1(1570.65,1509.04) ; U1.75@1636.87,773.92 1636.87,760.32 1650.65,746.54 v1(1693.15,746.54) ; v1@1693.65,746.54 v1(1693.15,746.54) ; U1.100@1705.76,1315.26 1718.65,1328.14 C9.2@1718.65,1379.04 1718.65,1354.54 v1(1718.15,1354.04) ; C3.2@1718.65,721.54 1718.15,721.54 v1(1693.15,746.54) ; R14.2@1882.65,759.04 1898.15,759.04 1905.65,766.54 v1(1908.15,766.54) ; v1(1960,1032.5) R16.2@1960,1058 ; v1(2238.15,439.04) v1@2245.65,446.54 ; U5.5@2279.76,1319.04 2279.76,1343.15 v1(2283.15,1346.54) ; C19.2@2282.65,1406.54 2282.65,1428.54 v1(2285.65,1431.54) ; v1(2423.15,661.54) 2416.15,661.54 2296.65,542.04 C48.2@2296.65,446.54 v1@2245.65,446.54 ; U21.5@2503.4,101.64 2488.3,86.54 2069.13,86.54 L5.2@1936.63,219.04 2164.13,446.54 v1@2245.65,446.54 ; v1(2938.15,389.04) 2940.65,391.54 R36.1@2940.65,419.04 ; R20.1@3380.65,1399.04 v1(3405.65,1399.04) ; v1(3933.15,1389.04) 3933.15,1253.07 D1.1@3982.18,1204.04
  Bottom Layer w6: v1(2238.15,439.04) 2255.65,439.04 2322.15,372.54 2931.65,372.54 2938.15,379.04 v1(2938.15,389.04) ; v1(2423.15,661.54) 2423.15,663.54 2423.65,664.04 2812.76,664.04 3079.76,931.04 3080.15,931.04 3405.65,1256.54 v1(3405.65,1399.04) 3413.15,1406.54 3915.65,1406.54 v1(3933.15,1389.04)
  other v1: 1870.65,89.04 2000.65,89.04 1813.15,161.54 2055.65,169.04 2053.15,271.54 1815.65,291.54 1875.65,374.04 2043.15,386.54 1958.15,389.04 2143.15,399.04 1958.15,459.04 2043.15,459.04 2143.15,459.04
+5V: C12.2 C15.2 C20.2 C21.2 C23.2 C24.2 C28.2 C29.2 C33.2 C34.2 C38.2 C40.2 C41.2 C44.2 C45.2 C46.2 C47.2 C49.2 C50.2 C52.2 R23.2 R32.2 U2.4 U4.4 U6.3 U7.3 U9.4 U9.8 U10.3 U11.3 U13.3 U14.3 U15.3 U17.3 U18.3 U19.3 U20.3 U22.3 U23.3 U24.3 U25.3 U26.3 | length 4214.7
  Top Layer w6: v1(680.65,2044.04) v1@685.65,2049.04 ; U4.4@2228.87,961.64 2296.05,961.64 C12.2@2300.65,957.04 2415.65,842.04 C38.2@2415.65,790.54 2394.65,790.54 2320.65,716.54 C15.2@2320.65,688.54 2293.74,661.64 U2.4@2248.87,661.64 ; R23.2@2840.65,2488.54 2845.15,2493.04 3199.22,2493.04 U9.8@3375.72,2316.54 ; v1(2920.65,2086.54) R32.2@2920.65,2061.04 2978.65,2119.04 3178.22,2119.04 U9.8@3375.72,2316.54 ; U9.4@3048.95,2316.54 3145.65,2316.54 ; v1(3163.15,2311.54) 3150.65,2311.54 3145.65,2316.54 ; v1(3378.15,2084.04) 3375.72,2086.46 U9.8@3375.72,2316.54 ; C24.2@3378.65,1919.04 3276.65,2021.04 3276.65,2217.46 U9.8@3375.72,2316.54 ; 3145.65,2316.54 U9.8@3375.72,2316.54
  Bottom Layer w6: v1(435.65,2046.54) 450.15,2046.54 U6.3@455.05,2041.64 460.65,2036.04 C20.2@460.65,1981.04 ; v1(558.15,2051.54) 568.01,2051.54 U10.3@577.91,2041.64 577.91,1988.06 C28.2@584.93,1981.04 ; v1(680.65,2044.04) 698.37,2044.04 U13.3@700.77,2041.64 700.77,1989.48 C33.2@709.22,1981.04 ; v1(803.15,2041.54) 803.24,2041.64 U17.3@823.63,2041.64 823.63,1990.91 C40.2@833.5,1981.04 ; v1(925.65,2041.54) 925.74,2041.64 U19.3@946.48,2041.64 946.48,1992.34 C44.2@957.79,1981.04 ; v1(1058.15,1986.54) 1058.15,2004.04 1069.34,2015.23 U22.3@1069.34,2041.64 1069.34,1993.77 C46.2@1082.07,1981.04 ; v1(1180.65,1986.54) 1192.2,1998.09 U24.3@1192.2,2041.64 1195.65,2038.19 1195.65,1991.75 C49.2@1206.36,1981.04 ; v1(1305.65,1984.04) 1315.65,1994.04 1315.65,2004.04 ; U26.3@1315.05,2041.64 1315.65,2041.04 1315.65,2004.04 ; C52.2@1330.64,1981.04 1315.65,1996.04 1315.65,2004.04 ; v1(1430.65,1984.04) 1438.15,1991.54 1438.15,2011.54 ; U7.3@1437.91,2041.64 1438.15,2041.4 1438.15,2011.54 ; C21.2@1454.93,1981.04 1438.15,1997.82 1438.15,2011.54 ; v1(1545.65,1981.54) 1553.14,1981.54 1565.93,1994.32 ; U11.3@1560.77,2041.64 1560.77,1999.48 1565.93,1994.32 ; C29.2@1579.22,1981.04 1565.93,1994.32 ; v1(1673.15,1979.04) 1683.63,1989.52 1683.63,2000.91 ; U14.3@1683.63,2041.64 1683.63,2000.91 ; C34.2@1703.5,1981.04 1683.63,2000.91 ; v1(1803.15,1984.04) 1807.86,1984.04 1816.33,1992.5 ; U18.3@1816.33,2041.64 1816.33,1992.5 ; C41.2@1827.79,1981.04 1816.33,1992.5 ; v1(1923.15,1981.54) 1923.15,1984.04 1936.11,1997 ; U20.3@1929.34,2041.64 1929.34,2003.77 1936.11,1997 ; C45.2@1952.07,1981.04 1936.11,1997 ; v1(2040.65,1981.54) 2048.14,1981.54 2062,1995.39 ; U23.3@2052.2,2041.64 2052.2,2005.2 2062,1995.39 ; C47.2@2076.36,1981.04 2062,1995.39 ; v1(2159.64,1987.54) 2167.14,1987.54 2168.15,1986.54 2185.39,2003.79 ; U25.3@2175.05,2041.64 2175.05,2014.13 2185.39,2003.79 ; C50.2@2200.64,1988.54 2185.39,2003.79
  other v1: 2635.65,1051.54 2493.15,1061.54 2543.15,1086.54 2478.15,1131.54 2398.15,1136.54 2658.15,1151.54 2545.65,1156.54 2610.65,1166.54 2455.65,1169.04
+6V: C39.2 D2.1 D12.A R38.1 U15.1 | length 1940
  Top Layer w6: 2615.65,727.54 2630,713.18 2630,599.68 v1(2660.65,569.04) ; C39.2@2730.65,986.54 v1(2748.15,969.04) ; v1(2840.65,579.04) 2851.15,589.54 R38.1@2865.55,589.54 ; v1(3950.65,1419.04) 3984.68,1385 D2.1@3984.68,1361.54
  Bottom Layer w6: v1(2660.65,569.04) 2670.65,579.04 v1(2840.65,579.04) ; v1(2748.15,969.04) 2750.65,971.54 3043.15,971.54 3365.65,1294.04 3365.65,1401.54 3384.65,1420.54 3949.15,1420.54 v1(3950.65,1419.04)
-5V: C26.1 C35.2 C36.2 R26.2 U9.6 U12.1 | length 571.6
  Top Layer w6: R26.2@2760.65,2488.54 2760.65,2470.65 2783.15,2470.65 v1(2785,2472.5) ; C36.2@3000.65,2048.54 3025.15,2048.54 v1(3025.65,2049.04) ; U9.6@3048.95,2216.54 v1(3110.65,2216.54) ; v1(3058.15,2026.54) C35.2@3096.65,2026.54 ; v1(3096.65,1983.04) C35.2@3096.65,2026.54 ; v1(3108.15,2064.04) 3096.65,2052.54 C35.2@3096.65,2026.54
  Bottom Layer w6: v1(2785,2472.5) 2887.5,2370 v1(2887.5,2197.5)
  other v1: 2498.15,1454.04 2553.15,1461.54 2605.65,1461.54 2548.15,1516.54 2595.65,1519.04 2550.65,1569.04 2460.65,1576.54 3155.65,2194.04
-6V: C25.2 D10.A R1.1 R25.1 U12.2 U12.4 | length 1983.1
  Top Layer w6: D10.A@2760.96,1269.73 2810.27,1319.04 v1(2855.65,1319.04) ; v1(3105.65,1404.04) 3150.65,1359.04 3245.65,1359.04 3270.65,1384.04 3270.65,1428.9 R25.1@3315.78,1474.04 v1(3345.65,1474.04) ; v1(3998.15,1459.04) 4018.15,1439.04 R1.1@4020.65,1439.04
  Top Layer w10: U12.2@2396.47,1319.04 U12.4@2624.82,1319.04 2711.65,1319.04 2746.65,1284.04 C25.2@2746.65,1119.04
  Bottom Layer w6: v1(2855.65,1319.04) 2940.65,1404.04 v1(3105.65,1404.04) ; v1(3345.65,1474.04) 3383.15,1511.54 3945.65,1511.54 v1(3998.15,1459.04)
AIN0: TP25.1 U1.23 U6.6 | length 1184.2
  Top Layer w6: v1(1083.15,1416.54) 1103.15,1436.54 1183.15,1436.54 1203.79,1415.89 U1.23@1203.79,1384.16
  Bottom Layer w6: U6.6@506.24,2116.44 530.65,2092.03 530.65,1879.04 TP25.1@640.65,1769.04 640.65,1734.04 695.65,1679.04 778.15,1679.04 808.15,1649.04 855.65,1649.04 1083.15,1421.54 v1(1083.15,1416.54)
AIN1: TP30.1 U1.24 U10.6 | length 1068.1
  Top Layer w6: v1(1115.65,1391.54) 1140.89,1416.78 1170.6,1416.78 1184.11,1403.27 U1.24@1184.11,1384.16
  Bottom Layer w6: U10.6@629.09,2116.44 653.15,2092.39 653.15,1901.54 740.65,1814.04 TP30.1@740.65,1769.04 740.65,1734.04 800.65,1674.04 865.65,1674.04 1115.65,1424.04 v1(1115.65,1391.54)
AIN2: TP32.1 U1.25 U13.6 | length 959.7
  Top Layer w6: v1(1135.65,1359.04) 1139.31,1359.04 U1.25@1164.42,1384.16
  Bottom Layer w6: U13.6@751.95,2116.44 751.95,2107.73 778.15,2081.54 778.15,1871.54 843.72,1805.96 TP32.1@843.72,1769.04 843.72,1733.46 1140.65,1436.54 1140.65,1364.04 v1(1135.65,1359.04)
AIN3: TP34.1 U1.26 U17.6 | length 1020.1
  Top Layer w6: U1.26@1095.53,1315.26 1096.75,1314.04 v1(1140.65,1314.04)
  Bottom Layer w6: U17.6@874.81,2116.44 874.81,2097.38 900.65,2071.54 900.65,1851.54 946.8,1805.38 TP34.1@946.8,1769.04 946.8,1750.38 1035.65,1661.54 1118.15,1661.54 1156.15,1623.54 1156.15,1368.94 1157.15,1367.94 1157.15,1350.13 1156.15,1349.13 1156.15,1329.54 v1(1140.65,1314.04)
AIN5: TP36.1 U1.30 U19.6 | length 1055.2
  Top Layer w6: U1.30@1095.53,1236.52 1125.63,1236.52 v1(1188.15,1299.04)
  Bottom Layer w6: U19.6@997.66,2116.44 997.66,2089.52 1030.65,2056.54 1030.65,1788.27 TP36.1@1049.88,1769.04 1049.88,1732.31 1057.38,1732.31 1108.15,1681.54 1168.15,1681.54 1168.15,1373.91 1169.15,1372.91 1169.15,1345.16 1168.15,1344.16 1168.15,1319.04 v1(1188.15,1299.04)
AIN6: TP38.1 U1.31 U22.6 | length 1045
  Top Layer w6: U1.31@1095.53,1216.83 1098.32,1214.04 1150.65,1214.04 v1(1150.65,1219.04)
  Bottom Layer w6: U22.6@1120.52,2116.44 1120.52,2089.16 1152.95,2056.73 TP38.1@1152.95,1769.04 1152.95,1731.73 1215.61,1669.07 1215.61,1291.5 1155.65,1231.54 1155.65,1209.04 1150.65,1214.04 v1(1150.65,1219.04)
AIN7: TP40.1 U1.32 U24.6 | length 1082
  Top Layer w6: U1.32@1095.53,1197.15 1173.76,1197.15 v1(1185.65,1209.04)
  Bottom Layer w6: v1(1185.65,1209.04) 1190.65,1209.04 1304.03,1322.43 1304.03,1437.94 1300.65,1441.33 1300.65,1513.63 1302.15,1515.13 1302.15,1659.63 1299.15,1662.63 1299.15,1680.44 1300.65,1681.94 1300.65,1753.65 1270.65,1783.65 1270.65,2056.54 1243.38,2083.8 U24.6@1243.38,2116.44
AIN8: TP43.1 U1.35 U26.6 | length 1229.3
  Top Layer w6: v1(1053.15,1139.04) 1094.58,1139.04 U1.35@1095.53,1138.09
  Bottom Layer w6: v1(1053.15,1139.04) 1054.65,1140.54 1152.15,1140.54 1345.65,1334.04 1345.65,1755.58 TP43.1@1359.11,1769.04 1359.11,1892.5 1393.15,1926.54 1393.15,2089.53 U26.6@1366.24,2116.44
AIN9: TP26.1 U1.36 U7.6 | length 1210.3
  Top Layer w6: U1.36@1095.53,1118.41 1145.02,1118.41 v1(1145.65,1119.04)
  Bottom Layer w6: v1(1145.65,1119.04) 1155.65,1119.04 1408.15,1371.54 1408.15,1440.65 1490.38,1522.88 1490.55,1522.88 1503.15,1535.47 1503.15,1553.28 1503.15,1691.54 1462.18,1732.5 TP26.1@1462.18,1769.04 ; TP26.1@1468.15,1804.04 1510.65,1846.54 1510.65,2079.04 1489.09,2100.59 U7.6@1489.09,2116.44
AIN10: TP31.1 U1.15 U11.6 | length 1012.1
  Top Layer w6: U1.15@1361.27,1384.16 1361.27,1360.91 1388.15,1334.04 v1(1410.65,1334.04)
  Bottom Layer w6: v1(1410.65,1334.04) 1413.15,1331.54 1423.67,1331.54 1601.15,1509.01 1601.15,1633.54 1565.26,1669.42 TP31.1@1565.26,1769.04 1565.26,1811.15 1638.15,1884.04 1638.15,2069.04 1611.95,2095.23 U11.6@1611.95,2116.44
AIN11: TP33.1 U1.16 U14.6 | length 1082.9
  Top Layer w6: U1.16@1341.59,1384.16 1341.59,1358.09 v1(1393.15,1306.54)
  Bottom Layer w6: v1(1393.15,1306.54) 1415.65,1306.54 1613.15,1504.04 1613.15,1676.54 1668.34,1731.73 TP33.1@1668.34,1769.04 1700.65,1801.34 1700.65,1871.54 1758.15,1929.04 1758.15,2071.54 1734.81,2094.88 U14.6@1734.81,2116.44
AIN12: TP35.1 U1.17 U18.6 | length 1237
  Top Layer w6: U1.17@1321.9,1384.16 1321.9,1332.78 v1(1383.15,1271.54)
  Bottom Layer w6: v1(1383.15,1271.54) 1404.73,1271.54 1647.15,1513.95 1647.15,1540.41 1666.77,1560.04 1693.23,1560.04 1771.41,1638.22 TP35.1@1771.41,1769.04 1771.41,1814.81 1898.15,1941.54 1898.15,2071.54 1867.51,2102.18 U18.6@1867.51,2116.44
AIN13: TP37.1 U1.18 U20.6 | length 1347.6
  Top Layer w6: U1.18@1305.65,1368.33 1305.65,1281.54 v1(1338.15,1249.04)
  Bottom Layer w6: v1(1338.15,1249.04) 1399.2,1249.04 1663.47,1513.3 1659.15,1517.63 1659.15,1535.44 1671.74,1548.04 1689.55,1548.04 1693.88,1543.71 1874.49,1724.32 TP37.1@1874.49,1769.04 1874.49,1810.38 2008.15,1944.04 2008.15,2081.54 1980.52,2109.16 U20.6@1980.52,2116.44
AIN14: TP39.1 U1.33 U23.6 | length 1565.6
  Top Layer w6: U1.33@1096.45,1176.54 U1.33@1095.53,1177.46 1097.1,1179.04 v1(1315.65,1179.04)
  Bottom Layer w6: v1(1315.65,1179.04) 1346.17,1179.04 1672.17,1505.04 1689.55,1505.04 1702.15,1517.63 1702.15,1535.01 1860.25,1693.11 1913.65,1693.11 1977.57,1757.02 TP39.1@1977.57,1769.04 1977.57,1795.96 2128.15,1946.54 2128.15,2081.54 2103.38,2106.3 U23.6@2103.38,2116.44
AIN15: TP41.1 U1.34 U25.6 | length 1704.5
  Top Layer w6: U1.34@1095.53,1157.54 v1(1290.65,1157.54)
  Bottom Layer w6: v1(1290.65,1157.54) 1341.65,1157.54 1677.15,1493.04 1694.52,1493.04 1714.15,1512.66 1714.15,1530.04 1865.22,1681.11 1918.62,1681.11 1931.83,1694.32 1937.2,1694.32 1938.41,1693.11 2016.73,1693.11 2022,1698.38 2022,1710.39 TP41.1@2080.64,1769.04 2080.64,1799.04 2118.15,1836.54 2155.65,1836.54 2248.15,1929.04 2248.15,2081.54 2226.24,2103.45 U25.6@2226.24,2116.44
AMP_SD: Q1.1 R32.1 U9.3 | length 683.2
  Top Layer w6: Q1.1@2837.06,2039.04 2900.65,2039.04 R32.1@2920.65,2019.04 2925.65,2019.04 2980.65,2074.04 3073.15,2074.04 v1(3080.65,2081.54) ; U9.3@3048.95,2366.54 3133.15,2366.54 v1(3140.65,2359.04)
  Bottom Layer w6: v1(3080.65,2081.54) 3070.65,2091.54 3070.65,2289.04 v1(3140.65,2359.04)
AMP_SD_CTRL: Q1.2 U1.58 | length 2225
  Top Layer w6: U1.58@1302.22,773.92 1300.65,775.49 1300.65,797.07 1320.15,816.57 1320.15,835.63 1329.65,845.13 1329.65,960.54 1660.65,1291.54 1660.65,1459.04 1718.15,1516.54 v1(1740.65,1516.54) ; v1(2375.65,1936.54) 2663.15,1936.54 2720.65,1994.04 2720.65,2046.54 2750.55,2076.44 Q1.2@2764.23,2076.44
  Bottom Layer w6: v1(1740.65,1516.54) 1890.65,1666.54 2105.65,1666.54 v1(2375.65,1936.54)
BOOT0: JMP1.1 R5.1 U1.94 | length 451.7
  Top Layer w6: U1.94@1705.76,1197.15 1710.54,1201.93 1833.53,1201.93 1865.65,1234.04 1985.65,1234.04 JMP1.1@2020.65,1199.04 2020.65,1119.35 R5.1@2040,1100
BOOT1: CON1.17 JO1.1 R6.2 U1.37 | length 966.2
  Top Layer w6: v1(645.65,909.04) 625.65,929.04 625.65,1054.04 695.65,1124.04 990.65,1124.04 ; v1(690.65,779.04) 688.79,777.19 688.79,775.89 CON1.17@760.65,775.89 ; JO1.1@1000.65,1159.04 990.65,1149.04 990.65,1124.04 ; U1.37@1095.53,1098.72 1090.75,1103.5 1071.64,1103.5 1071.1,1104.04 1027.65,1104.04 R6.2@1002.65,1079.04 990.65,1091.04 990.65,1124.04
  Bottom Layer w6: v1(645.65,909.04) 645.65,824.04 v1(690.65,779.04)
D+: U3.6 USB.3 | length 130.3
  Top Layer w6: U3.6@1420.33,447.15 1423.15,444.33 1423.15,321.54 USB.3@1420.65,319.04
D-: U3.4 USB.2 | length 133.8
  Top Layer w6: U3.4@1380.96,447.15 1378.15,444.33 1378.15,379.04 1389.15,368.03 USB.2@1389.15,319.04
ELEC0: CON3.2 R18.1 TP23.1 U6.4 | length 583.3
  Top Layer w6: CON3.2@480.65,2449.12 523.22,2449.12 v1(523.22,2453.96)
  Bottom Layer w6: TP23.1@320.65,2079.04 358.05,2116.44 U6.4@455.05,2116.44 430.65,2140.85 430.65,2269.04 R18.1@480.65,2319.04 480.65,2411.38 v1(523.22,2453.96)
ELEC1: CON3.4 R21.1 U10.4 | length 418.1
  Top Layer w6: CON3.4@580.65,2449.12 625.72,2449.12 v1(625.8,2449.04)
  Bottom Layer w6: U10.4@577.91,2116.44 553.15,2141.21 553.15,2270.11 R21.1@602.07,2319.04 602.07,2425.31 v1(625.8,2449.04)
ELEC2: CON3.6 R29.1 U13.4 | length 412.9
  Top Layer w6: CON3.6@680.65,2449.12 725.57,2449.12 v1(725.65,2449.04)
  Bottom Layer w6: U13.4@700.77,2116.44 670.65,2146.56 670.65,2266.18 R29.1@723.5,2319.04 725.65,2321.18 v1(725.65,2449.04)
ELEC3: CON3.8 R34.1 U17.4 | length 417
  Top Layer w6: CON3.8@780.65,2449.12 828.07,2449.12 v1(828.15,2449.04)
  Bottom Layer w6: U17.4@823.63,2116.44 798.15,2141.92 798.15,2272.25 R34.1@844.93,2319.04 828.15,2335.82 v1(828.15,2449.04)
ELEC5: CON3.10 R40.1 U19.4 | length 441
  Top Layer w6: CON3.10@880.65,2449.12 930.57,2449.12 v1(930.65,2449.04)
  Bottom Layer w6: v1(930.65,2449.04) 930.65,2354.75 R40.1@966.36,2319.04 953.15,2319.04 913.15,2279.04 913.15,2149.78 U19.4@946.48,2116.44
ELEC6: CON3.12 R43.1 U22.4 | length 458.3
  Top Layer w6: CON3.12@980.65,2449.12 1025.72,2449.12 v1(1025.8,2449.04)
  Bottom Layer w6: v1(1025.8,2449.04) 1045.65,2429.19 1045.65,2361.18 R43.1@1087.79,2319.04 1083.15,2319.04 1015.65,2251.54 1015.65,2170.13 U22.4@1069.34,2116.44
ELEC7: CON3.14 R45.1 U24.4 | length 463.6
  Top Layer w6: CON3.14@1080.65,2449.12 v1(1128.22,2449.12)
  Bottom Layer w6: v1(1128.22,2449.12) 1158.15,2419.19 1158.15,2370.11 R45.1@1209.22,2319.04 1140.65,2250.47 1140.65,2176.54 1192.2,2124.98 U24.4@1192.2,2116.44
ELEC8: CON3.16 R47.1 U26.4 | length 474.1
  Top Layer w6: CON3.16@1180.65,2449.12 1228.07,2449.12 v1(1228.15,2449.04)
  Bottom Layer w6: v1(1228.15,2449.04) 1330.64,2346.54 R47.1@1330.64,2319.04 1330.64,2316.54 1260.65,2246.54 1260.65,2170.85 U26.4@1315.05,2116.44
ELEC9: CON3.18 R19.1 U7.4 | length 469.1
  Top Layer w6: CON3.18@1280.65,2449.12 1325.57,2449.12 v1(1325.65,2449.04)
  Bottom Layer w6: v1(1325.65,2449.04) 1452.07,2322.61 R19.1@1452.07,2319.04 1452.07,2307.97 1397.81,2253.7 1397.81,2156.54 U7.4@1437.91,2116.44
ELEC10: CON3.20 R22.1 U11.4 | length 493.5
  Top Layer w6: CON3.20@1380.65,2449.12 1423.07,2449.12 v1(1425.65,2446.54)
  Bottom Layer w6: v1(1425.65,2446.54) 1455.65,2446.54 1573.5,2328.68 R22.1@1573.5,2319.04 1520.65,2266.18 1520.65,2156.56 U11.4@1560.77,2116.44
ELEC11: CON3.22 R30.1 U14.4 | length 517
  Top Layer w6: CON3.22@1480.65,2449.12 1525.57,2449.12 v1(1525.65,2449.04)
  Bottom Layer w6: v1(1525.65,2449.04) 1585.65,2449.04 1694.93,2339.75 R30.1@1694.93,2319.04 1648.15,2272.25 1648.15,2151.92 U14.4@1683.63,2116.44
ELEC12: CON3.24 R35.1 U18.4 | length 539.1
  Top Layer w6: CON3.24@1580.65,2449.12 1625.57,2449.12 v1(1625.65,2449.04)
  Bottom Layer w6: v1(1625.65,2449.04) 1700.65,2449.04 1816.36,2333.32 R35.1@1816.36,2319.04 1777.36,2280.04 1777.36,2144.82 1785.65,2136.54 1796.23,2136.54 U18.4@1816.33,2116.44
ELEC13: CON3.26 R41.1 U20.4 | length 567.8
  Top Layer w6: CON3.26@1680.65,2449.12 1695.57,2464.04 v1(1728.15,2464.04)
  Bottom Layer w6: v1(1728.15,2464.04) 1753.15,2464.04 1870.65,2346.54 1910.29,2346.54 R41.1@1937.79,2319.04 1883.15,2264.4 1883.15,2169.04 1929.34,2122.84 U20.4@1929.34,2116.44
ELEC14: CON3.28 R44.1 U23.4 | length 580.7
  Top Layer w6: CON3.28@1780.65,2449.12 v1(1825.57,2449.12)
  Bottom Layer w6: v1(1825.57,2449.12) 1858.07,2449.12 1928.15,2379.04 1999.22,2379.04 R44.1@2059.22,2319.04 2000.65,2260.47 2000.65,2167.99 U23.4@2052.2,2116.44
ELEC15: CON3.30 R46.1 U25.4 | length 612.3
  Top Layer w6: CON3.30@1880.65,2449.12 1928.07,2449.12 v1(1928.15,2449.04)
  Bottom Layer w6: v1(1928.15,2449.04) 1960.65,2449.04 2033.15,2376.54 2123.14,2376.54 R46.1@2180.64,2319.04 2180.64,2311.54 2128.15,2259.04 2128.15,2151.54 2135.65,2144.04 2158.15,2144.04 2172.55,2129.63 2175.05,2129.63 U25.4@2175.05,2116.44